# EAGLE board BeagleBone_Blue (EAGLE 7.3.0), part 1 of 4
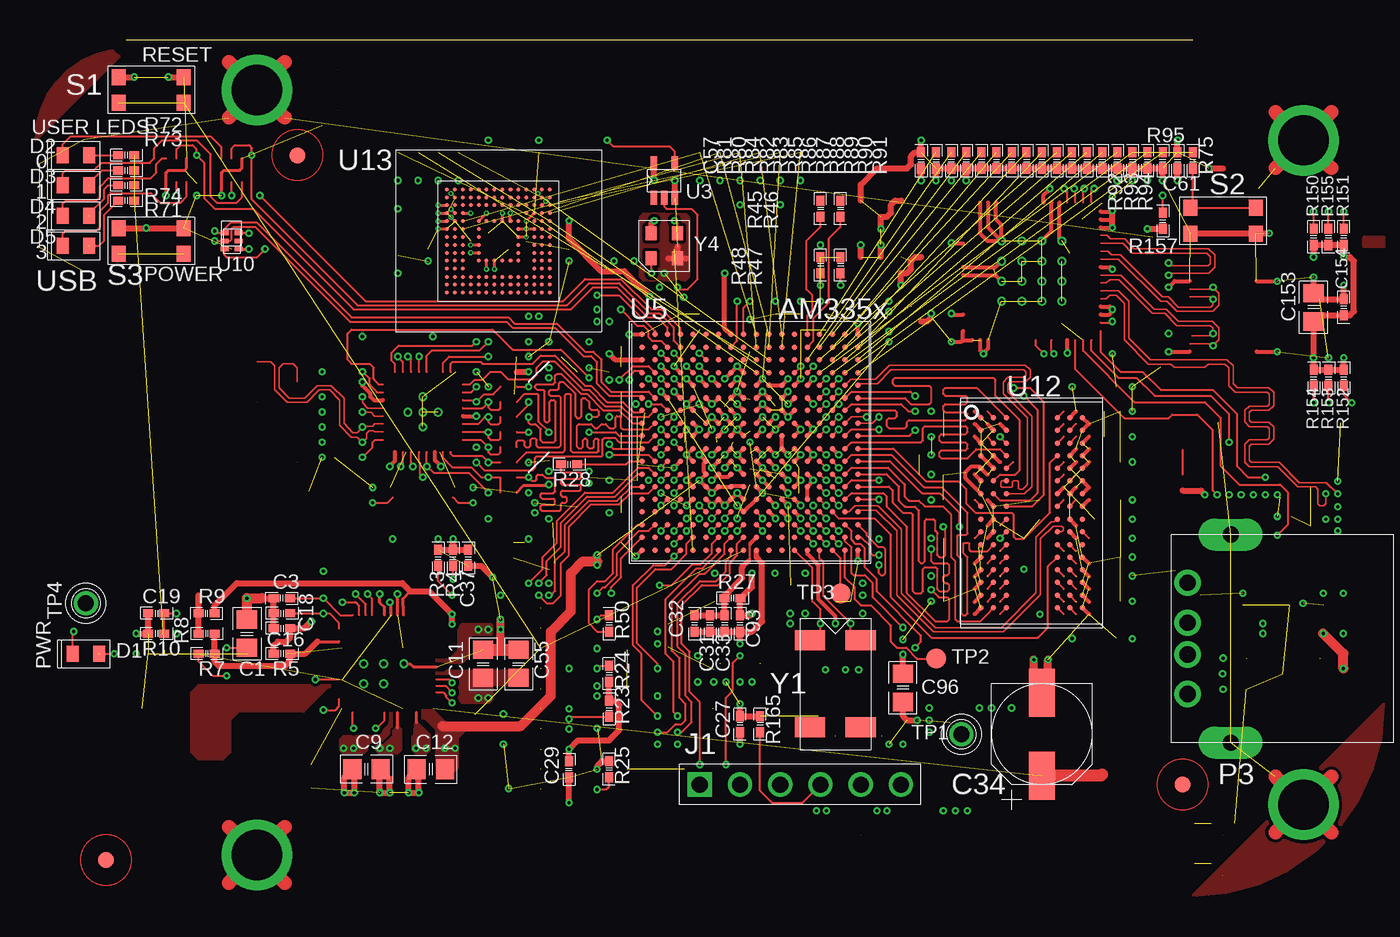
[diagram p0: board, top side]
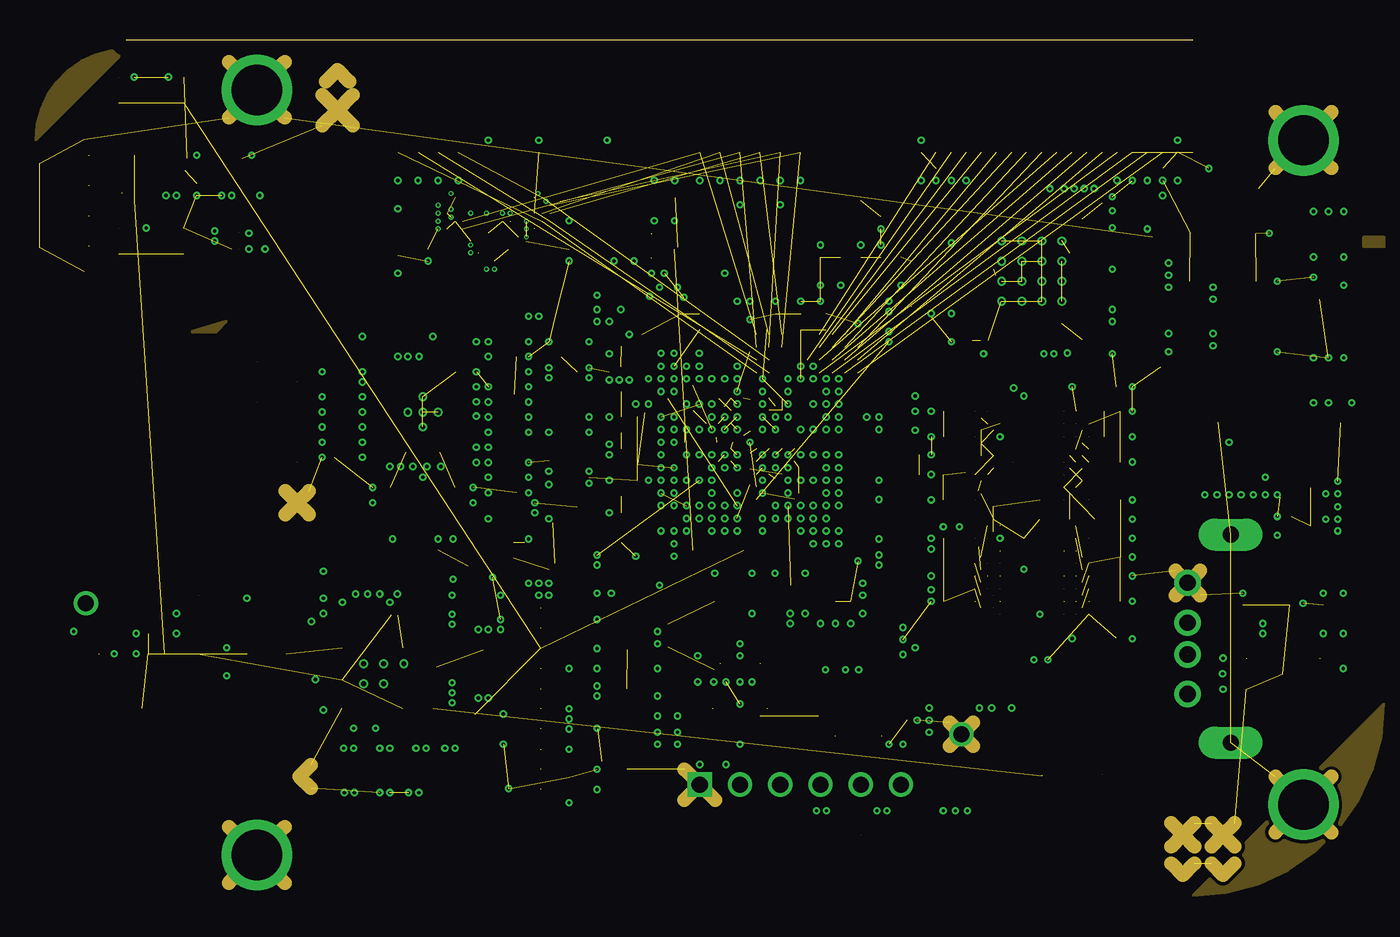
[diagram p1: board, inner layer Route2]
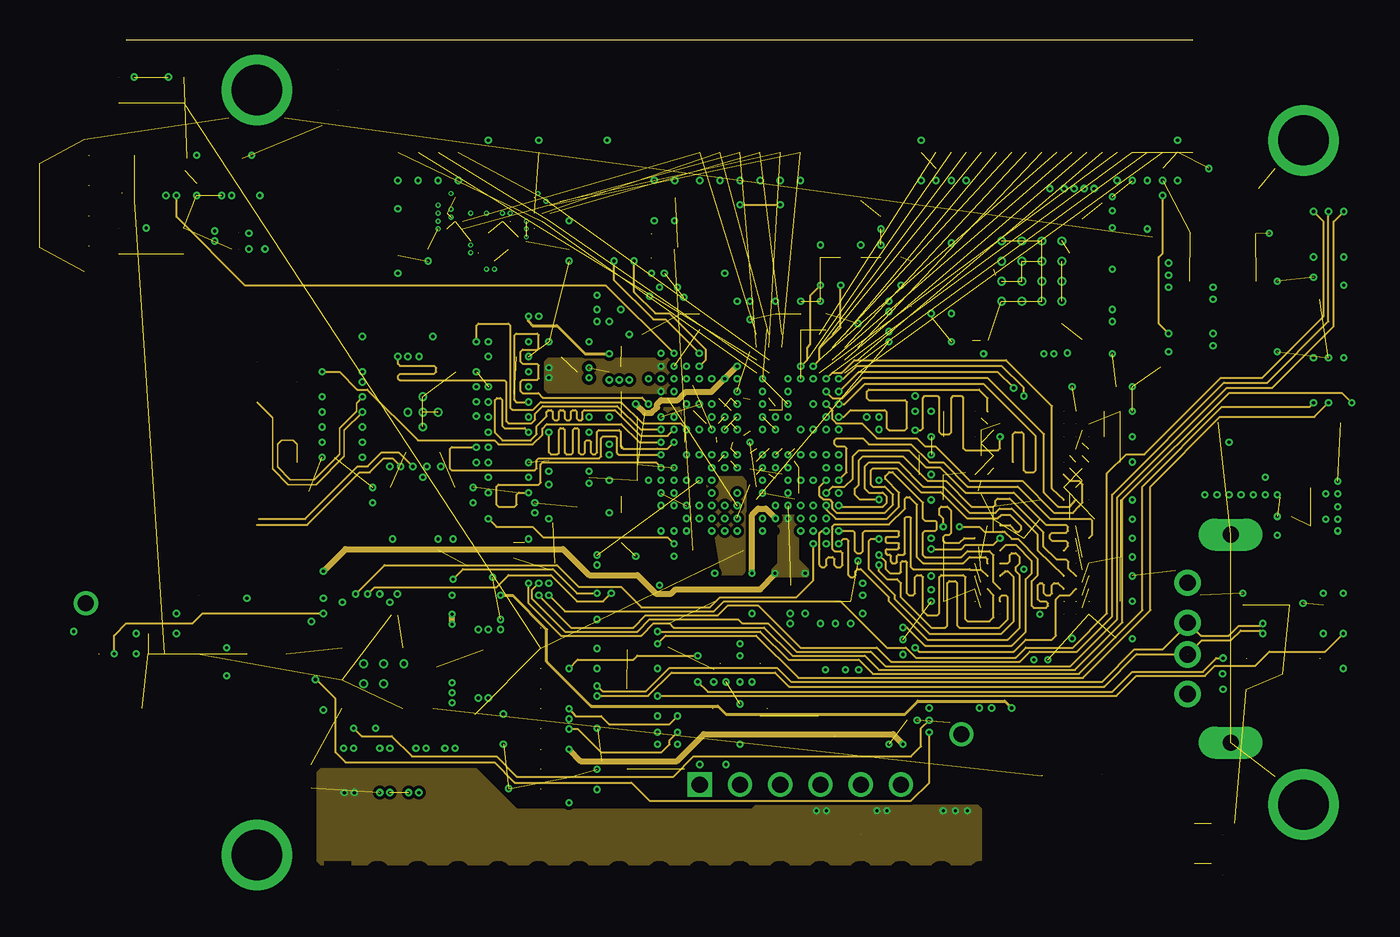
[diagram p2: board, inner layer Route3]
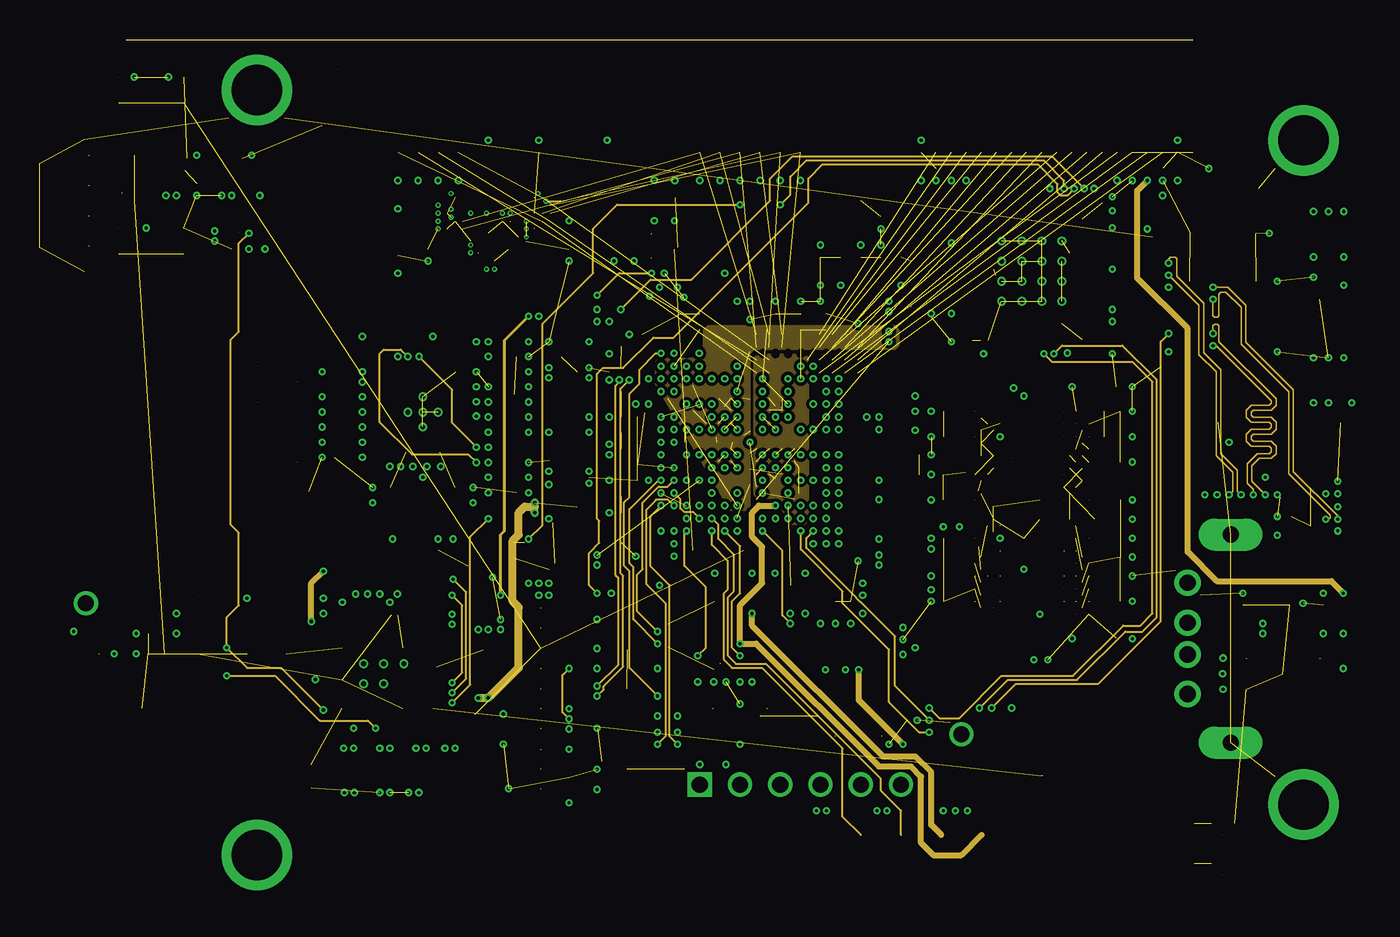
[diagram p3: board, inner layer Route4]
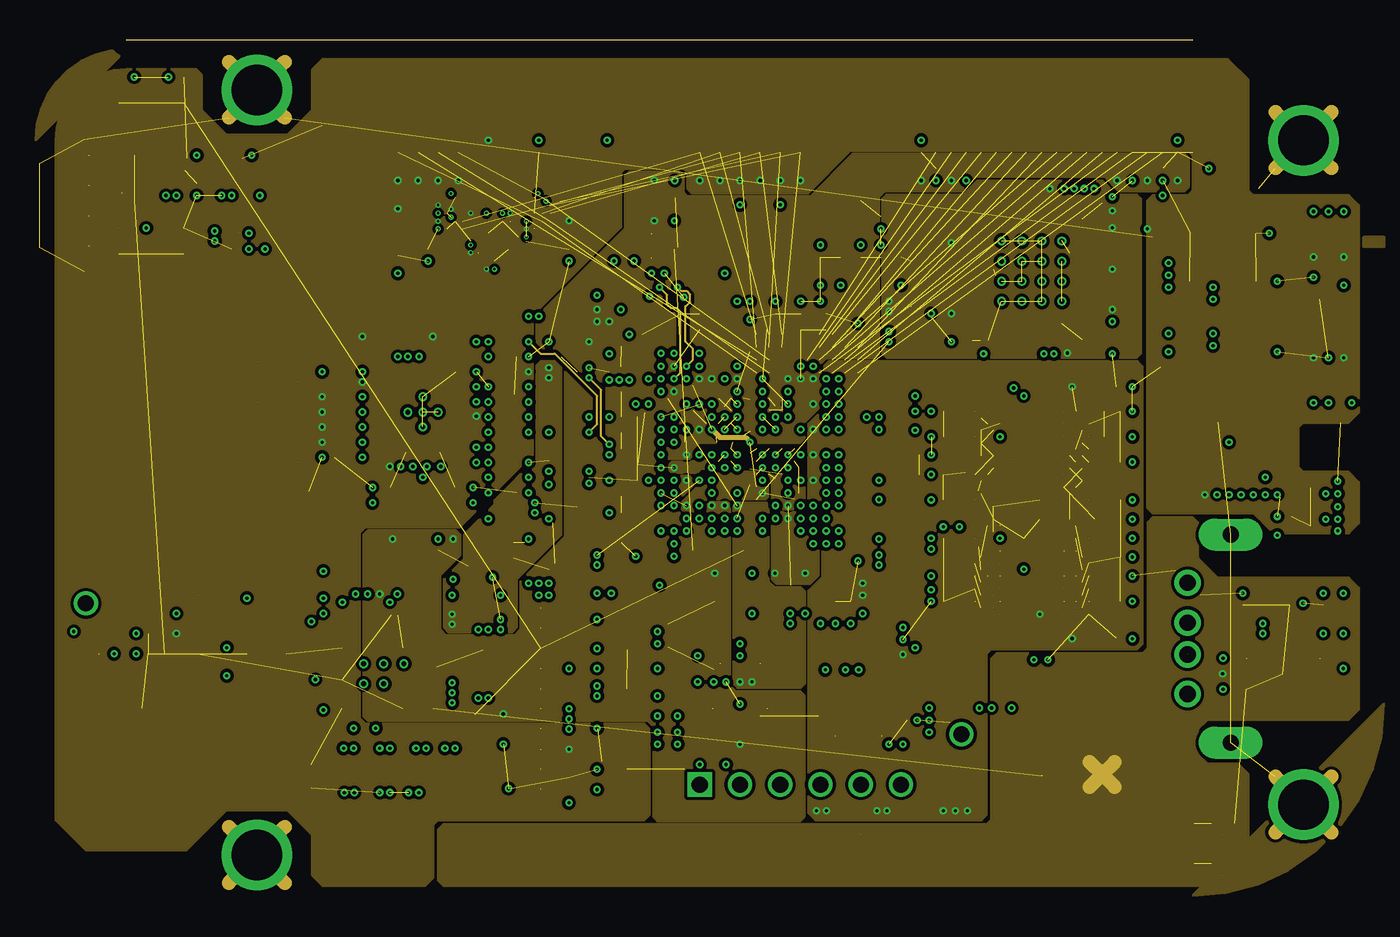
[diagram p4: board, inner layer Route5]
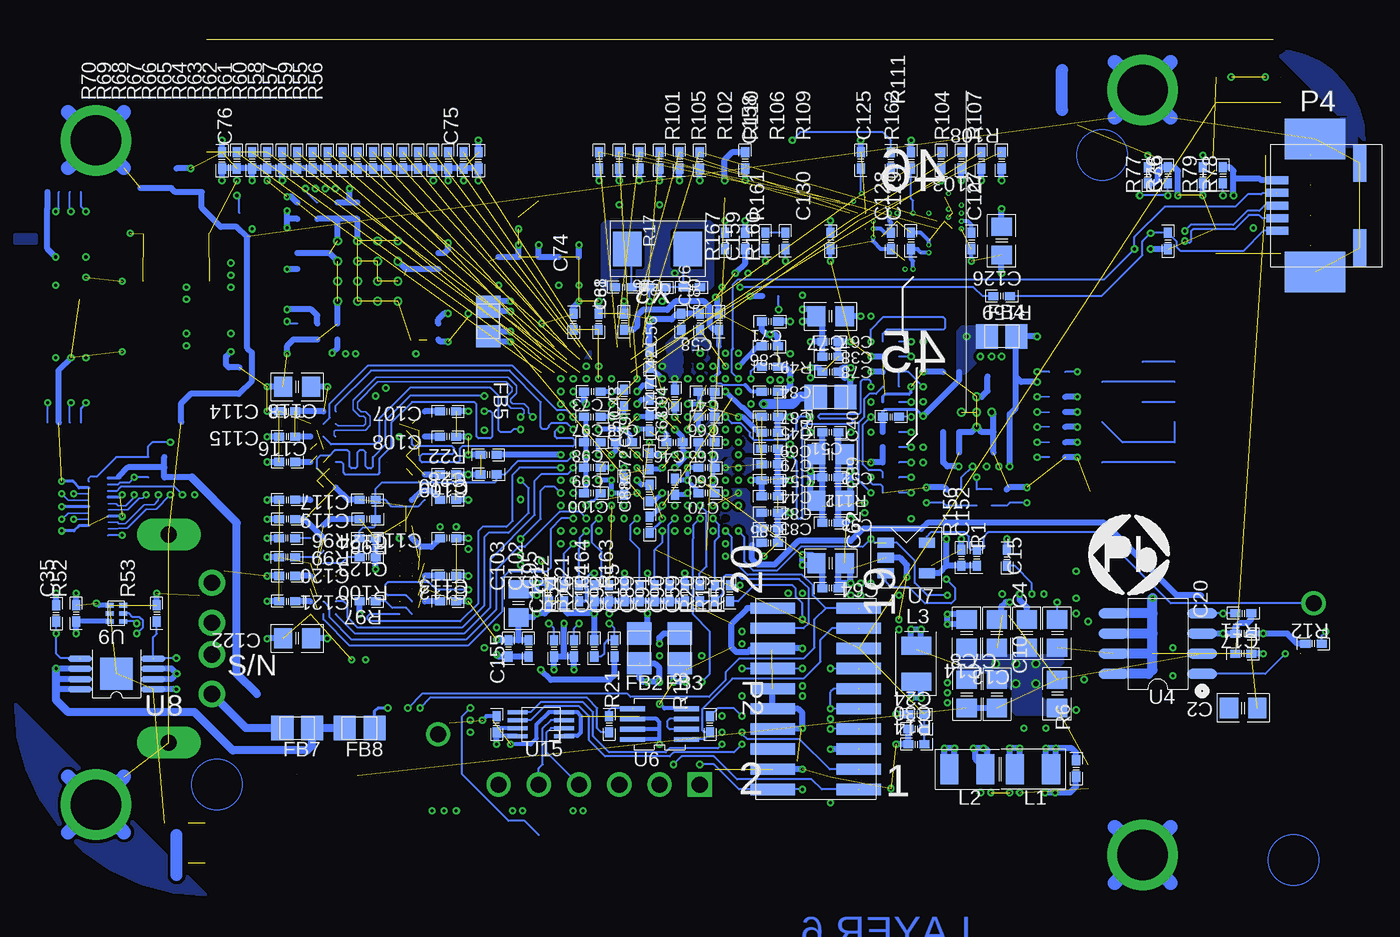
[diagram p5: board, bottom side, seen from below]

Size 67.31 x 0 mm. Coordinates in mm from the lower left corner, seen from the top.
Outline: 0,0 67.31,0
Copper layers (1*16): Top 0.035mm / dielectric 1.5mm / Bottom 0.035mm
Design rules "BeagleBone_Black_RevB4": minimum track width 10mil, minimum drill 24mil, track to track 8mil, track to pad 8mil, pad to pad 8mil, via to via 8mil, smd to smd 8mil, copper to edge 40mil, drill to drill 8mil, minimum pad ring 0mil, minimum via ring 0mil, stop-mask expansion 4mil, vias tented up to drill 0mil, thermal gap 10mil

## Footprints (pad centres in the part's own frame; a part is rotated, then mirrored left to right if it is on the bottom)
805_1PRIMARY = smd 1.143 x 1.27: 1 -0.889,0; 2 0.889,0
402_2PRIMARY = smd 0.635 x 0.508: 1 -0.508,0; 2 0.508,0
805_2PRIMARY = smd 1.143 x 1.27: 1 -0.889,0; 2 0.889,0
402_1PRIMARY = smd 0.635 x 0.508: 1 -0.508,0; 2 0.508,0
RD205SMD_250D_1PRIMARY = smd 3.048 x 1.651: 1 -2.616,0; 2 2.616,0
LED_0603_1PRIMARY = smd 0.762 x 1.016: 1 -0.838,0; 2 0.838,0
P:EX40Y40D01 = smd 1.016 x 1.016: 0 0,0
SM-7351-IND-0805_1PRIMARY = smd 1.397 x 1.549: 1 0.94,0; 2 -0.94,0
SIP6_1PRIMARY = drill 1.016 pad 1.524 square: 1 0,6.35 | drill 1.016 pad 1.524: 2 0,3.81; 3 0,1.27; 4 0,-1.27; 5 0,-3.81; 6 0,-6.35
2520_1PRIMARY = smd 1.143 x 1.905: 1 1.143,0; 2 -1.143,0
MTGH200C125D_PL_1PRIMARY = drill 3.175 pad 4.445: 1 -0.406,0
HEADER10X2_SMD_1PRIMARY = smd 0.711 x 2.794: 1 5.715,2.718; 2 5.715,-2.718; 3 4.445,2.718; 4 4.445,-2.718; 5 3.175,2.718; 6 3.175,-2.718; 7 1.905,2.718; 8 1.905,-2.718; 9 0.635,2.718; 10 0.635,-2.718; 11 -0.635,2.718; 12 -0.635,-2.718; 13 -1.905,2.718; 14 -1.905,-2.718; 15 -3.175,2.718; 16 -3.175,-2.718; 17 -4.445,2.718; 18 -4.445,-2.718; 19 -5.715,2.718; 20 -5.715,-2.718
USB_A_SH_1PRIMARY = drill 1.016 pad 1.651: 1 -3.48,5.994; 2 -0.991,5.994; 3 1.016,5.994; 4 3.531,5.994 | drill 1.016 pad 2.032 long: 5 -6.553,3.277; 6 6.579,3.277
USB5MINI_4SHIELDED_SMD-5_1PRIMARY = smd 1.397 x 0.508: 1 -2.997,-1.6; 2 -2.997,-0.813; 3 -2.997,0; 4 -2.997,0.813; 5 -2.997,1.6 | smd 3.81 x 2.54: 6 -0.61,-4.191; 7 -0.61,4.191 | smd 0.813 x 2.362: 8 2.21,-2.667; 9 2.21,2.667
SW4SMD_63X161LS_1PRIMARY = smd 0.889 x 1.016: 1 -2.057,-0.813; 2 -2.057,0.813; 3 2.057,-0.813; 4 2.057,0.813
TP1-8040_1PRIMARY = drill 1.016 pad 1.524: 1 0,0
TP60C_SMD_1PRIMARY = smd 1.27 x 1.27: 1 0,0
DCK5_2P15X1P4_1PRIMARY = smd 0.406 x 0.889: 1 -0.66,-1.092; 2 0,-1.092; 3 0.66,-1.092; 4 0.66,1.092; 5 -0.66,1.092
SO8-25X75_1PRIMARY = smd 0.635 x 1.905: 1 1.905,2.794; 2 0.635,2.794; 3 -0.635,2.794; 4 -1.905,2.794; 5 -1.905,-2.794; 6 -0.635,-2.794; 7 0.635,-2.794; 8 1.905,-2.794
AM33XX_15X15_1PRIMARY = smd 0.356 x 0.356: 1 -6.807,6.807; 2 -5.994,6.807; 3 -5.207,6.807; 4 -4.394,6.807; 5 -3.607,6.807; 6 -2.794,6.807; 7 -2.007,6.807; 8 -1.194,6.807; 9 -0.406,6.807; 10 0.406,6.807; 11 1.194,6.807; 12 2.007,6.807; 13 2.794,6.807; 14 3.607,6.807; 15 4.394,6.807; 16 5.207,6.807; 17 5.994,6.807; 18 6.807,6.807; 19 -6.807,5.994; 20 -5.994,5.994; 21 -5.207,5.994; 22 -4.394,5.994; 23 -3.607,5.994; 24 -2.794,5.994; 25 -2.007,5.994; 26 -1.194,5.994; 27 -0.406,5.994; 28 0.406,5.994; 29 1.194,5.994; 30 2.007,5.994; 31 2.794,5.994; 32 3.607,5.994; 33 4.394,5.994; 34 5.207,5.994; 35 5.994,5.994; 36 6.807,5.994; 37 -6.807,5.207; 38 -5.994,5.207; 39 -5.207,5.207; 40 -4.394,5.207; 41 -3.607,5.207; 42 -2.794,5.207; 43 -2.007,5.207; 44 -1.194,5.207; 45 -0.406,5.207; 46 0.406,5.207; 47 1.194,5.207; 48 2.007,5.207; 49 2.794,5.207; 50 3.607,5.207; 51 4.394,5.207; 52 5.207,5.207; 53 5.994,5.207; 54 6.807,5.207; 55 -6.807,4.394; 56 -5.994,4.394; 57 -5.207,4.394; 58 -4.394,4.394; 59 -3.607,4.394; 60 -2.794,4.394; 61 -2.007,4.394; 62 -1.194,4.394; 63 -0.406,4.394; 64 0.406,4.394; 65 1.194,4.394; 66 2.007,4.394; 67 2.794,4.394; 68 3.607,4.394; 69 4.394,4.394; 70 5.207,4.394; 71 5.994,4.394; 72 6.807,4.394; 73 -6.807,3.607; 74 -5.994,3.607; 75 -5.207,3.607; 76 -4.394,3.607; 77 -3.607,3.607; 78 -2.794,3.607; 79 -2.007,3.607; 80 -1.194,3.607; 81 -0.406,3.607; 82 0.406,3.607; 83 1.194,3.607; 84 2.007,3.607; 85 2.794,3.607; 86 3.607,3.607; 87 4.394,3.607; 88 5.207,3.607; 89 5.994,3.607; 90 6.807,3.607; 91 -6.807,2.794; 92 -5.994,2.794; 93 -5.207,2.794; 94 -4.394,2.794; 95 -3.607,2.794; 96 -2.794,2.794; 97 -2.007,2.794; 98 -1.194,2.794; 99 -0.406,2.794; 100 0.406,2.794; 101 1.194,2.794; 102 2.007,2.794; 103 2.794,2.794; 104 3.607,2.794; 105 4.394,2.794; 106 5.207,2.794; 107 5.994,2.794; 108 6.807,2.794; 109 -6.807,2.007; 110 -5.994,2.007; 111 -5.207,2.007; 112 -4.394,2.007; 113 -3.607,2.007; 114 -2.794,2.007; 115 -2.007,2.007; 116 -1.194,2.007; 117 -0.406,2.007; 118 0.406,2.007; 119 1.194,2.007; 120 2.007,2.007; 121 2.794,2.007; 122 3.607,2.007; 123 4.394,2.007; 124 5.207,2.007; 125 5.994,2.007; 126 6.807,2.007; 127 -6.807,1.194; 128 -5.994,1.194; 129 -5.207,1.194; 130 -4.394,1.194; 131 -3.607,1.194; 132 -2.794,1.194; 133 -2.007,1.194; 134 -1.194,1.194; 135 -0.406,1.194; 136 0.406,1.194; 137 1.194,1.194; 138 2.007,1.194; 139 2.794,1.194; 140 3.607,1.194; 141 4.394,1.194; 142 5.207,1.194; 143 5.994,1.194; 144 6.807,1.194; 145 -6.807,0.406; 146 -5.994,0.406; 147 -5.207,0.406; 148 -4.394,0.406; 149 -3.607,0.406; 150 -2.794,0.406; 151 -2.007,0.406; 152 -1.194,0.406; 153 -0.406,0.406; 154 0.406,0.406; 155 1.194,0.406; 156 2.007,0.406; 157 2.794,0.406; 158 3.607,0.406; 159 4.394,0.406; 160 5.207,0.406; 161 5.994,0.406; 162 6.807,0.406; 163 -6.807,-0.406; 164 -5.994,-0.406; 165 -5.207,-0.406; 166 -4.394,-0.406; 167 -3.607,-0.406; 168 -2.794,-0.406; 169 -2.007,-0.406; 170 -1.194,-0.406; 171 -0.406,-0.406; 172 0.406,-0.406; 173 1.194,-0.406; 174 2.007,-0.406; 175 2.794,-0.406; 176 3.607,-0.406; 177 4.394,-0.406; 178 5.207,-0.406; 179 5.994,-0.406; 180 6.807,-0.406; 181 -6.807,-1.194; 182 -5.994,-1.194; 183 -5.207,-1.194; 184 -4.394,-1.194; 185 -3.607,-1.194; 186 -2.794,-1.194; 187 -2.007,-1.194; 188 -1.194,-1.194; 189 -0.406,-1.194; 190 0.406,-1.194; 191 1.194,-1.194; 192 2.007,-1.194; 193 2.794,-1.194; 194 3.607,-1.194; 195 4.394,-1.194; 196 5.207,-1.194; 197 5.994,-1.194; 198 6.807,-1.194; 199 -6.807,-2.007; 200 -5.994,-2.007; 201 -5.207,-2.007; 202 -4.394,-2.007; 203 -3.607,-2.007; 204 -2.794,-2.007; 205 -2.007,-2.007; 206 -1.194,-2.007; 207 -0.406,-2.007; 208 0.406,-2.007; 209 1.194,-2.007; 210 2.007,-2.007; 211 2.794,-2.007; 212 3.607,-2.007; 213 4.394,-2.007; 214 5.207,-2.007; 215 5.994,-2.007; 216 6.807,-2.007; 217 -6.807,-2.794; 218 -5.994,-2.794; 219 -5.207,-2.794; 220 -4.394,-2.794; 221 -3.607,-2.794; 222 -2.794,-2.794; 223 -2.007,-2.794; 224 -1.194,-2.794; 225 -0.406,-2.794; 226 0.406,-2.794; 227 1.194,-2.794; 228 2.007,-2.794; 229 2.794,-2.794; 230 3.607,-2.794; 231 4.394,-2.794; 232 5.207,-2.794; 233 5.994,-2.794; 234 6.807,-2.794; 235 -6.807,-3.607; 236 -5.994,-3.607; 237 -5.207,-3.607; 238 -4.394,-3.607; 239 -3.607,-3.607; 240 -2.794,-3.607; 241 -2.007,-3.607; 242 -1.194,-3.607; 243 -0.406,-3.607; 244 0.406,-3.607; 245 1.194,-3.607; 246 2.007,-3.607; 247 2.794,-3.607; 248 3.607,-3.607; 249 4.394,-3.607; 250 5.207,-3.607; 251 5.994,-3.607; 252 6.807,-3.607; 253 -6.807,-4.394; 254 -5.994,-4.394; 255 -5.207,-4.394; 256 -4.394,-4.394; 257 -3.607,-4.394; 258 -2.794,-4.394; 259 -2.007,-4.394; 260 -1.194,-4.394; 261 -0.406,-4.394; 262 0.406,-4.394; 263 1.194,-4.394; 264 2.007,-4.394; 265 2.794,-4.394; 266 3.607,-4.394; 267 4.394,-4.394; 268 5.207,-4.394; 269 5.994,-4.394; 270 6.807,-4.394; 271 -6.807,-5.207; 272 -5.994,-5.207; 273 -5.207,-5.207; 274 -4.394,-5.207; 275 -3.607,-5.207; 276 -2.794,-5.207; 277 -2.007,-5.207; 278 -1.194,-5.207; 279 -0.406,-5.207; 280 0.406,-5.207; 281 1.194,-5.207; 282 2.007,-5.207; 283 2.794,-5.207; 284 3.607,-5.207; 285 4.394,-5.207; 286 5.207,-5.207; 287 5.994,-5.207; 288 6.807,-5.207; 289 -6.807,-5.994; 290 -5.994,-5.994; 291 -5.207,-5.994; 292 -4.394,-5.994; 293 -3.607,-5.994; 294 -2.794,-5.994; 295 -2.007,-5.994; 296 -1.194,-5.994; 297 -0.406,-5.994; 298 0.406,-5.994; 299 1.194,-5.994; 300 2.007,-5.994; 301 2.794,-5.994; 302 3.607,-5.994; 303 4.394,-5.994; 304 5.207,-5.994; 305 5.994,-5.994; 306 6.807,-5.994; 307 -6.807,-6.807; 308 -5.994,-6.807; 309 -5.207,-6.807; 310 -4.394,-6.807; 311 -3.607,-6.807; 312 -2.794,-6.807; 313 -2.007,-6.807; 314 -1.194,-6.807; 315 -0.406,-6.807; 316 0.406,-6.807; 317 1.194,-6.807; 318 2.007,-6.807; 319 2.794,-6.807; 320 3.607,-6.807; 321 4.394,-6.807; 322 5.207,-6.807; 323 5.994,-6.807; 324 6.807,-6.807
SOP8_DCT_1PRIMARY = smd 0.305 x 1.6: 1 0.965,1.702; 2 0.33,1.702; 3 -0.33,1.702; 4 -0.965,1.702; 5 -0.965,-1.702; 6 -0.33,-1.702; 7 0.33,-1.702; 8 0.965,-1.702
SOT23-5_1PRIMARY = smd 0.635 x 1.016: 1 0.965,1.295; 2 0,1.295; 3 -0.965,1.295; 4 -0.965,-1.295; 5 0.965,-1.295
DGN-16X60_1PRIMARY = smd 0.406 x 1.524: 1 0.965,2.311; 2 0.33,2.311; 3 -0.33,2.311; 4 -0.965,2.311; 5 -0.965,-2.311; 6 -0.33,-2.311; 7 0.33,-2.311; 8 0.965,-2.311 | smd 2.032 x 2.032: 9 0,0
U_6_DRY_1PRIMARY = smd 0.305 x 0.508: 1 -0.508,-0.432; 2 0,-0.432; 3 0.508,-0.432; 4 0.508,0.432; 5 0,0.432; 6 -0.508,0.432
BGA96_T9_P8_9X14_1PRIMARY = smd 0.356 x 0.356: 1 -3.2,5.994; 2 -2.413,5.994; 3 -1.6,5.994; 4 1.6,5.994; 5 2.413,5.994; 6 3.2,5.994; 7 -3.2,5.207; 8 -2.413,5.207; 9 -1.6,5.207; 10 1.6,5.207; 11 2.413,5.207; 12 3.2,5.207; 13 -3.2,4.394; 14 -2.413,4.394; 15 -1.6,4.394; 16 1.6,4.394; 17 2.413,4.394; 18 3.2,4.394; 19 -3.2,3.607; 20 -2.413,3.607; 21 -1.6,3.607; 22 1.6,3.607; 23 2.413,3.607; 24 3.2,3.607; 25 -3.2,2.794; 26 -2.413,2.794; 27 -1.6,2.794; 28 1.6,2.794; 29 2.413,2.794; 30 3.2,2.794; 31 -3.2,2.007; 32 -2.413,2.007; 33 -1.6,2.007; 34 1.6,2.007; 35 2.413,2.007; 36 3.2,2.007; 37 -3.2,1.194; 38 -2.413,1.194; 39 -1.6,1.194; 40 1.6,1.194; 41 2.413,1.194; 42 3.2,1.194; 43 -3.2,0.406; 44 -2.413,0.406; 45 -1.6,0.406; 46 1.6,0.406; 47 2.413,0.406; 48 3.2,0.406; 49 -3.2,-0.406; 50 -2.413,-0.406; 51 -1.6,-0.406; 52 1.6,-0.406; 53 2.413,-0.406; 54 3.2,-0.406; 55 -3.2,-1.194; 56 -2.413,-1.194; 57 -1.6,-1.194; 58 1.6,-1.194; 59 2.413,-1.194; 60 3.2,-1.194; 61 -3.2,-2.007; 62 -2.413,-2.007; 63 -1.6,-2.007; 64 1.6,-2.007; 65 2.413,-2.007; 66 3.2,-2.007; 67 -3.2,-2.794; 68 -2.413,-2.794; 69 -1.6,-2.794; 70 1.6,-2.794; 71 2.413,-2.794; 72 3.2,-2.794; 73 -3.2,-3.607; 74 -2.413,-3.607; 75 -1.6,-3.607; 76 1.6,-3.607; 77 2.413,-3.607; 78 3.2,-3.607; 79 -3.2,-4.394; 80 -2.413,-4.394; 81 -1.6,-4.394; 82 1.6,-4.394; 83 2.413,-4.394; 84 3.2,-4.394; 85 -3.2,-5.207; 86 -2.413,-5.207; 87 -1.6,-5.207; 88 1.6,-5.207; 89 2.413,-5.207; 90 3.2,-5.207; 91 -3.2,-5.994; 92 -2.413,-5.994; 93 -1.6,-5.994; 94 1.6,-5.994; 95 2.413,-5.994; 96 3.2,-5.994
BGA153_P14_P5_11P5X13_1PRIMARY = smd 0.254 x 0.254: 1 -3.251,3.251; 2 -2.743,3.251; 3 -2.261,3.251; 4 -1.753,3.251; 5 -1.245,3.251; 6 -0.762,3.251; 7 -0.254,3.251; 8 0.254,3.251; 9 0.762,3.251; 10 1.245,3.251; 11 1.753,3.251; 12 2.261,3.251; 13 2.743,3.251; 14 3.251,3.251; 15 -3.251,2.743; 16 -2.743,2.743; 17 -2.261,2.743; 18 -1.753,2.743; 19 -1.245,2.743; 20 -0.762,2.743; 21 -0.254,2.743; 22 0.254,2.743; 23 0.762,2.743; 24 1.245,2.743; 25 1.753,2.743; 26 2.261,2.743; 27 2.743,2.743; 28 3.251,2.743; 29 -3.251,2.261; 30 -2.743,2.261; 31 -2.261,2.261; 32 -1.753,2.261; 33 -1.245,2.261; 34 -0.762,2.261; 35 -0.254,2.261; 36 0.254,2.261; 37 0.762,2.261; 38 1.245,2.261; 39 1.753,2.261; 40 2.261,2.261; 41 2.743,2.261; 42 3.251,2.261; 43 -3.251,1.753; 44 -2.743,1.753; 45 -2.261,1.753; 46 -1.753,1.753; 47 2.261,1.753; 48 2.743,1.753; 49 3.251,1.753; 50 -3.251,1.245; 51 -2.743,1.245; 52 -2.261,1.245; 53 -1.245,1.245; 54 -0.762,1.245; 55 -0.254,1.245; 56 0.254,1.245; 57 0.762,1.245; 58 1.245,1.245; 59 2.261,1.245; 60 2.743,1.245; 61 3.251,1.245; 62 -3.251,0.762; 63 -2.743,0.762; 64 -2.261,0.762; 65 -1.245,0.762; 66 1.245,0.762; 67 2.261,0.762; 68 2.743,0.762; 69 3.251,0.762; 70 -3.251,0.254; 71 -2.743,0.254; 72 -2.261,0.254; 73 -1.245,0.254; 74 1.245,0.254; 75 2.261,0.254; 76 2.743,0.254; 77 3.251,0.254; 78 -3.251,-0.254; 79 -2.743,-0.254; 80 -2.261,-0.254; 81 -1.245,-0.254; 82 1.245,-0.254; 83 2.261,-0.254; 84 2.743,-0.254; 85 3.251,-0.254; 86 -3.251,-0.762; 87 -2.743,-0.762; 88 -2.261,-0.762; 89 -1.245,-0.762; 90 1.245,-0.762; 91 2.261,-0.762; 92 2.743,-0.762; 93 3.251,-0.762; 94 -3.251,-1.245; 95 -2.743,-1.245; 96 -2.261,-1.245; 97 -1.245,-1.245; 98 -0.762,-1.245; 99 -0.254,-1.245; 100 0.254,-1.245; 101 0.762,-1.245; 102 1.245,-1.245; 103 2.261,-1.245; 104 2.743,-1.245; 105 3.251,-1.245; 106 -3.251,-1.753; 107 -2.743,-1.753; 108 -2.261,-1.753; 109 2.261,-1.753; 110 2.743,-1.753; 111 3.251,-1.753; 112 -3.251,-2.261; 113 -2.743,-2.261; 114 -2.261,-2.261; 115 -1.753,-2.261; 116 -1.245,-2.261; 117 -0.762,-2.261; 118 -0.254,-2.261; 119 0.254,-2.261; 120 0.762,-2.261; 121 1.245,-2.261; 122 1.753,-2.261; 123 2.261,-2.261; 124 2.743,-2.261; 125 3.251,-2.261; 126 -3.251,-2.743; 127 -2.743,-2.743; 128 -2.261,-2.743; 129 -1.753,-2.743; 130 -1.245,-2.743; 131 -0.762,-2.743; 132 -0.254,-2.743; 133 0.254,-2.743; 134 0.762,-2.743; 135 1.245,-2.743; 136 1.753,-2.743; 137 2.261,-2.743; 138 2.743,-2.743; 139 3.251,-2.743; 140 -3.251,-3.251; 141 -2.743,-3.251; 142 -2.261,-3.251; 143 -1.753,-3.251; 144 -1.245,-3.251; 145 -0.762,-3.251; 146 -0.254,-3.251; 147 0.254,-3.251; 148 0.762,-3.251; 149 1.245,-3.251; 150 1.753,-3.251; 151 2.261,-3.251; 152 2.743,-3.251; 153 3.251,-3.251
U_8_DCU_1PRIMARY = smd 0.254 x 1.27: 1 0.762,1.473; 2 0.254,1.473; 3 -0.254,1.473; 4 -0.762,1.473; 5 -0.762,-1.473; 6 -0.254,-1.473; 7 0.254,-1.473; 8 0.762,-1.473
XTAL4_126-216SMD_1PRIMARY = smd 1.27 x 1.905: 1 -2.743,-1.6; 2 2.743,-1.6; 3 2.743,1.6; 4 -2.743,1.6
XTAL150SMD_125X196_1PRIMARY = smd 1.778 x 2.159: 1 -1.905,0; 2 1.905,0
OSC4_61X65LS_79X98SMD_1PRIMARY = smd 0.711 x 0.889: 1 -0.838,-0.787; 2 0.838,-0.787; 3 0.838,0.787; 4 -0.838,0.787

## Placement (x,y rotation side)
C1  10uF,_10V  [805_1PRIMARY]  7.62,-37.47 270 top  (outside the outline)
C2  10uF,_10V  [805_1PRIMARY]  1.9,-42.16 180 bottom  (outside the outline)
C3  0.1uf,_6V3  [402_2PRIMARY]  9.83,-35.23 0 top  (outside the outline)
C4  10uF,_10V  [805_2PRIMARY]  13.64,-37.47 90 bottom  (outside the outline)
C7  10uF,_10V  [805_1PRIMARY]  17.45,-41.28 270 bottom  (outside the outline)
C8  10uF,_10V  [805_1PRIMARY]  19.35,-41.28 270 bottom  (outside the outline)
C9  10uF,_10V  [805_1PRIMARY]  15.16,-46.02 180 top  (outside the outline)
C10  10uF,_10V  [805_2PRIMARY]  13.64,-41.28 90 bottom  (outside the outline)
C11  10uF,_10V  [805_1PRIMARY]  22.53,-39.37 270 top  (outside the outline)
C12  10uF,_10V  [805_1PRIMARY]  19.23,-46.02 0 top  (outside the outline)
C13  10uF,_10V  [805_2PRIMARY]  17.45,-37.47 90 bottom  (outside the outline)
C14  10uF,_10V  [805_2PRIMARY]  19.35,-37.47 90 bottom  (outside the outline)
C15  10uF,_10V  [805_2PRIMARY]  15.54,-37.47 90 bottom  (outside the outline)
C16  2.2uF,_6V3  [402_2PRIMARY]  9.83,-37.13 180 top  (outside the outline)
C17  2.2uF,_6V3  [402_1PRIMARY]  1.9,-38.73 0 bottom  (outside the outline)
C18  2.2uF,_6V3  [402_2PRIMARY]  9.83,-36.2 180 top  (outside the outline)
C19  470pF,_50V  [402_2PRIMARY]  1.9,-36.2 180 top  (outside the outline)
C20  0.1uf,_6V3  [402_1PRIMARY]  1.9,-37.47 0 bottom  (outside the outline)
C21  18pF,_50V  [402_1PRIMARY]  44.12,-38.4 90 bottom  (outside the outline)
C22  18pF,_50V  [402_1PRIMARY]  45.39,-38.4 90 bottom  (outside the outline)
C24  1uF,_10V  [402_1PRIMARY]  22.53,-43.48 180 bottom  (outside the outline)
C25  18pF,_50V  [402_1PRIMARY]  41.02,-15.62 180 bottom  (outside the outline)
C26  18pF,_50V  [402_1PRIMARY]  36.7,-15.62 0 bottom  (outside the outline)
C27  0.1uf,_6V3  [402_2PRIMARY]  38.73,-43.18 90 top  (outside the outline)
C28  0.1uf,_6V3  [402_1PRIMARY]  49.53,-27.43 180 bottom  (outside the outline)
C29  0.1uf,_6V3  [402_2PRIMARY]  27.94,-46.02 270 top  (outside the outline)
C30  0.1uf,_6V3  [402_1PRIMARY]  22.53,-44.45 180 bottom  (outside the outline)
C31  0.1uf,_6V3  [402_2PRIMARY]  36.83,-36.83 270 top  (outside the outline)
C32  1nF,_50V  [402_2PRIMARY]  35.86,-36.83 270 top  (outside the outline)
C33  0.1uf,_6V3  [402_2PRIMARY]  37.77,-36.83 270 top  (outside the outline)
C34  100uF,_6V3  [RD205SMD_250D_1PRIMARY]  57.79,-43.81 90 top  (outside the outline)
C35  0.1uf,_6V3  [402_1PRIMARY]  75.54,-36.2 90 bottom  (outside the outline)
C36  0.1uf,_6V3  [402_2PRIMARY]  6.65,-12.7 270 bottom  (outside the outline)
C37  0.1uf,_6V3  [402_2PRIMARY]  21.59,-32.69 270 top  (outside the outline)
C38  0.1uf,_6V3  [402_1PRIMARY]  27.94,-19.99 0 bottom  (outside the outline)
C39  10uF,_10V  [805_1PRIMARY]  27.94,-29.08 180 bottom  (outside the outline)
C40  10uF,_10V  [805_1PRIMARY]  27.94,-26.16 180 bottom  (outside the outline)
C41  0.1uf,_6V3  [402_1PRIMARY]  35.76,-22.2 0 bottom  (outside the outline)
C42  0.1uf,_6V3  [402_2PRIMARY]  39.37,-22.2 270 bottom  (outside the outline)
C43  0.1uf,_6V3  [402_1PRIMARY]  40.97,-22.61 90 bottom  (outside the outline)
C44  0.1uf,_6V3  [402_1PRIMARY]  31.78,-28.8 0 bottom  (outside the outline)
C45  0.1uf,_6V3  [402_1PRIMARY]  31.78,-24.79 0 bottom  (outside the outline)
C46  0.1uf,_6V3  [402_1PRIMARY]  37.8,-25.4 180 bottom  (outside the outline)
C47  0.1uf,_6V3  [402_2PRIMARY]  39.37,-24.21 270 bottom  (outside the outline)
C48  0.1uf,_6V3  [402_1PRIMARY]  40.97,-25.4 180 bottom  (outside the outline)
C49  0.1uf,_6V3  [402_1PRIMARY]  39.37,-26.59 90 bottom  (outside the outline)
C50  0.1uf,_6V3  [402_1PRIMARY]  40.97,-28.19 90 bottom  (outside the outline)
C51  0.1uf,_6V3  [402_1PRIMARY]  27.94,-24.77 0 bottom  (outside the outline)
C52  0.1uf,_6V3  [402_1PRIMARY]  27.94,-27.61 0 bottom  (outside the outline)
C53  0.1uf,_6V3  [402_1PRIMARY]  27.94,-30.48 0 bottom  (outside the outline)
C54  0.1uf,_6V3  [402_1PRIMARY]  31.78,-27.79 0 bottom  (outside the outline)
C55  10uF,_10V  [805_1PRIMARY]  24.77,-39.37 270 top  (outside the outline)
C56  0.1uf,_6V3  [402_2PRIMARY]  39.37,-20.19 270 bottom  (outside the outline)
C57  0.1uf,_6V3  [402_2PRIMARY]  50.16,-7.62 270 top  (outside the outline)
C58  0.1uf,_6V3  [402_1PRIMARY]  36.17,-17.81 90 bottom  (outside the outline)
C59  0.1uf,_6V3  [402_2PRIMARY]  37.13,-34.92 270 bottom  (outside the outline)
C60  0.1uf,_6V3  [402_1PRIMARY]  35.76,-27 0 bottom  (outside the outline)
C61  0.1uf,_6V3  [402_2PRIMARY]  66.34,-7.62 270 top  (outside the outline)
C62  10uF,_10V  [805_1PRIMARY]  27.94,-33.02 180 bottom  (outside the outline)
C63  0.1uf,_6V3  [402_1PRIMARY]  37.77,-28.19 90 bottom  (outside the outline)
C64  0.1uf,_6V3  [402_1PRIMARY]  27.94,-34.59 0 bottom  (outside the outline)
C65  0.1uf,_6V3  [402_1PRIMARY]  35.76,-25.4 0 bottom  (outside the outline)
C66  0.1uf,_6V3  [402_1PRIMARY]  35.76,-23.8 0 bottom  (outside the outline)
C67  0.1uf,_6V3  [402_1PRIMARY]  27.94,-19.05 0 bottom  (outside the outline)
C68  0.1uf,_6V3  [402_2PRIMARY]  42.57,-17.81 270 bottom  (outside the outline)
C69  0.1uf,_6V3  [402_1PRIMARY]  31.78,-25.81 180 bottom  (outside the outline)
C70  0.1uf,_6V3  [402_1PRIMARY]  35.76,-28.6 0 bottom  (outside the outline)
C71  0.1uf,_6V3  [402_1PRIMARY]  31.75,-17.78 0 bottom  (outside the outline)
C72  0.1uf,_6V3  [402_2PRIMARY]  39.37,-28.6 270 bottom  (outside the outline)
C73  0.1uf,_6V3  [402_1PRIMARY]  42.98,-22.2 180 bottom  (outside the outline)
C74  0.1uf,_6V3  [402_2PRIMARY]  44.17,-17.81 270 bottom  (outside the outline)
C75  0.1uf,_6V3  [402_2PRIMARY]  50.16,-7.62 270 bottom  (outside the outline)
C76  0.1uf,_6V3  [402_2PRIMARY]  66.34,-7.62 270 bottom  (outside the outline)
C77  10uF,_10V  [805_2PRIMARY]  27.94,-17.45 0 bottom  (outside the outline)
C78  0.1uf,_6V3  [402_1PRIMARY]  27.94,-20.95 180 bottom  (outside the outline)
C79  0.1uf,_6V3  [402_1PRIMARY]  31.78,-26.8 0 bottom  (outside the outline)
C80  0.1uf,_6V3  [402_1PRIMARY]  34.98,-17.81 90 bottom  (outside the outline)
C81  0.1uf,_6V3  [402_1PRIMARY]  40.97,-17.81 90 bottom  (outside the outline)
C82  0.1uf,_6V3  [402_1PRIMARY]  31.78,-29.85 0 bottom  (outside the outline)
C83  0.1uf,_6V3  [402_1PRIMARY]  31.78,-30.81 0 bottom  (outside the outline)
C84  0.1uf,_6V3  [402_1PRIMARY]  31.78,-22.2 0 bottom  (outside the outline)
C85  0.1uf,_6V3  [402_1PRIMARY]  31.78,-31.75 0 bottom  (outside the outline)
C86  0.1uf,_6V3  [402_1PRIMARY]  31.78,-19.35 0 bottom  (outside the outline)
C87  0.1uf,_6V3  [402_1PRIMARY]  31.78,-23.8 0 bottom  (outside the outline)
C88  0.1uf,_6V3  [402_2PRIMARY]  39.37,-30.61 270 bottom  (outside the outline)
C89  1uF,_10V  [402_2PRIMARY]  40,-34.92 270 bottom  (outside the outline)
C90  1uF,_10V  [402_2PRIMARY]  38.1,-34.92 270 bottom  (outside the outline)
C91  1uF,_10V  [402_2PRIMARY]  39.04,-34.92 270 bottom  (outside the outline)
C92  0.1uf,_6V3  [402_2PRIMARY]  41.91,-34.92 270 bottom  (outside the outline)
C93  0.1uf,_6V3  [402_2PRIMARY]  38.73,-36.83 270 top  (outside the outline)
C94  0.1uf,_6V3  [402_2PRIMARY]  37.77,-22.61 270 bottom  (outside the outline)
C95  10uF,_10V  [805_2PRIMARY]  47.62,-35.56 90 bottom  (outside the outline)
C96  10uF,_10V  [805_1PRIMARY]  49.02,-40.89 90 top  (outside the outline)
C97  0.1uf,_6V3  [402_1PRIMARY]  42.98,-23.8 0 bottom  (outside the outline)
C98  0.1uf,_6V3  [402_1PRIMARY]  42.98,-25.4 0 bottom  (outside the outline)
C99  0.1uf,_6V3  [402_1PRIMARY]  42.98,-27 0 bottom  (outside the outline)
C100  0.1uf,_6V3  [402_1PRIMARY]  42.98,-28.6 0 bottom  (outside the outline)
C101  0.1uf,_6V3  [402_2PRIMARY]  45.72,-34.92 270 bottom  (outside the outline)
C102  0.1uf,_6V3  [402_1PRIMARY]  46.99,-38.4 90 bottom  (outside the outline)
C103  0.1uf,_6V3  [402_1PRIMARY]  48.26,-38.4 90 bottom  (outside the outline)
C104  1uF,_10V  [402_2PRIMARY]  42.85,-34.92 270 bottom  (outside the outline)
C105  0.1uf,_6V3  [402_2PRIMARY]  40.94,-34.92 270 bottom  (outside the outline)
C106  0.1uf,_6V3  [402_1PRIMARY]  37.36,-17.81 90 bottom  (outside the outline)
C107  0.1uf,_6V3  [402_1PRIMARY]  52.07,-23.44 0 bottom  (outside the outline)
C108  0.1uf,_6V3  [402_1PRIMARY]  52.07,-25.04 0 bottom  (outside the outline)
C109  0.1uf,_6V3  [402_1PRIMARY]  52.07,-27.43 0 bottom  (outside the outline)
C110  0.1uf,_6V3  [402_1PRIMARY]  52.07,-29.03 0 bottom  (outside the outline)
C111  0.1uf,_6V3  [402_1PRIMARY]  52.07,-31.45 0 bottom  (outside the outline)
C112  0.1uf,_6V3  [402_1PRIMARY]  52.07,-33.83 0 bottom  (outside the outline)
C113  0.1uf,_6V3  [402_1PRIMARY]  52.07,-35.43 0 bottom  (outside the outline)
C114  0.1uf,_6V3  [402_1PRIMARY]  62.23,-23.44 180 bottom  (outside the outline)
C115  0.1uf,_6V3  [402_1PRIMARY]  62.23,-25.04 180 bottom  (outside the outline)
C116  0.1uf,_6V3  [402_1PRIMARY]  62.23,-26.64 180 bottom  (outside the outline)
C117  0.1uf,_6V3  [402_1PRIMARY]  62.23,-29.03 180 bottom  (outside the outline)
C118  10uF,_10V  [805_2PRIMARY]  61.59,-21.89 0 bottom  (outside the outline)
C119  0.1uf,_6V3  [402_1PRIMARY]  62.23,-30.25 180 bottom  (outside the outline)
C120  0.1uf,_6V3  [402_1PRIMARY]  62.23,-33.83 180 bottom  (outside the outline)
C121  0.1uf,_6V3  [402_1PRIMARY]  62.23,-35.43 180 bottom  (outside the outline)
C122  10uF,_10V  [805_2PRIMARY]  61.59,-37.77 0 bottom  (outside the outline)
C123  1nF,_50V  [402_1PRIMARY]  57.15,-30.25 180 bottom  (outside the outline)
C124  0.1uf,_6V3  [402_1PRIMARY]  57.15,-32.64 0 bottom  (outside the outline)
C125  2.2uF,_6V3  [402_1PRIMARY]  26.03,-7.62 90 bottom  (outside the outline)
C126  10uF,_10V  [805_2PRIMARY]  17.15,-12.7 90 bottom  (outside the outline)
C127  0.1uf,_6V3  [402_2PRIMARY]  19.05,-12.7 270 bottom  (outside the outline)
C128  0.1uf,_6V3  [402_1PRIMARY]  22.86,-12.7 90 bottom  (outside the outline)
C129  0.1uf,_6V3  [402_2PRIMARY]  24.13,-12.7 270 bottom  (outside the outline)
C130  0.1uf,_6V3  [402_2PRIMARY]  27.94,-12.7 270 bottom  (outside the outline)
C152  0.1uf,_6V3  [402_1PRIMARY]  19.68,-32.69 90 bottom  (outside the outline)
C153  10uF,_10V  [805_1PRIMARY]  74.93,-16.89 90 top  (outside the outline)
C154  0.1uf,_6V3  [402_2PRIMARY]  76.84,-16.89 90 top  (outside the outline)
C155  0.1uf,_6V3  [402_2PRIMARY]  49.02,-43.18 270 bottom  (outside the outline)
C158  0.1uf,_6V3  [402_1PRIMARY]  33.32,-7.62 90 bottom  (outside the outline)
C159  0.1uf,_6V3  [402_2PRIMARY]  33.32,-12.7 270 bottom  (outside the outline)
D1  598-8170-107F  [LED_0603_1PRIMARY]  -2.54,-38.73 0 top  (outside the outline)
D2  598-8170-107F  [LED_0603_1PRIMARY]  -3.17,-7.29 0 top  (outside the outline)
D3  598-8170-107F  [LED_0603_1PRIMARY]  -3.17,-9.19 0 top  (outside the outline)
D4  598-8170-107F  [LED_0603_1PRIMARY]  -3.17,-11.1 0 top  (outside the outline)
D5  598-8170-107F  [LED_0603_1PRIMARY]  -3.17,-13 0 top  (outside the outline)
DUMMY1  [P:EX40Y40D01]  -1.27,-51.75 0 top  (outside the outline)
DUMMY2  [P:EX40Y40D01]  66.67,-46.99 0 top  (outside the outline)
DUMMY3  [P:EX40Y40D01]  10.79,-7.3 0 top  (outside the outline)
FB1  150OHM800mA  [SM-7351-IND-0805_1PRIMARY]  27.94,-22.53 0 bottom  (outside the outline)
FB2  150OHM800mA  [SM-7351-IND-0805_1PRIMARY]  40,-38.4 90 bottom  (outside the outline)
FB3  150OHM800mA  [SM-7351-IND-0805_1PRIMARY]  37.46,-38.4 90 bottom  (outside the outline)
FB4  150OHM800mA  [SM-7351-IND-0805_1PRIMARY]  17.15,-18.72 180 bottom  (outside the outline)
FB5  150OHM800mA  [SM-7351-IND-0805_1PRIMARY]  49.53,-17.78 90 bottom  (outside the outline)
FB7  150OHM800mA  [SM-7351-IND-0805_1PRIMARY]  61.59,-43.43 0 bottom  (outside the outline)
FB8  0.1_Ohm,_0805  [SM-7351-IND-0805_1PRIMARY]  57.66,-43.43 0 bottom  (outside the outline)
J1  HEADER_6  [SIP6_1PRIMARY]  42.55,-46.99 90 top  (outside the outline)
L1  2.2uH,_2.6A  [2520_1PRIMARY]  15.16,-46.02 180 bottom  (outside the outline)
L2  2.2uH,_2.6A  [2520_1PRIMARY]  19.3,-46.02 0 bottom  (outside the outline)
L3  2.2uH,_2.6A  [2520_1PRIMARY]  22.53,-39.37 90 bottom  (outside the outline)
MTG1  MHOLE  [MTGH200C125D_PL_1PRIMARY]  8.26,-51.03 90 top  (outside the outline)
MTG2  MHOLE  [MTGH200C125D_PL_1PRIMARY]  74.3,-47.85 90 top  (outside the outline)
MTG3  MHOLE  [MTGH200C125D_PL_1PRIMARY]  8.26,-2.77 90 top  (outside the outline)
MTG4  MHOLE  [MTGH200C125D_PL_1PRIMARY]  74.3,-5.94 90 top  (outside the outline)
P2  CTI_JTAG,DNI  [HEADER10X2_SMD_1PRIMARY]  28.88,-41.58 270 bottom  (outside the outline)
P3  USB-A_Conn._-_87520-xx1xx  [USB_A_SH_1PRIMARY]  72.97,-37.8 90 top  (outside the outline)
P4  mini_USB-B  [USB5MINI_4SHIELDED_SMD-5_1PRIMARY]  -3.25,-10.46 0 bottom  (outside the outline)
R1  100K,_1%  [402_2PRIMARY]  16.81,-32.69 270 bottom  (outside the outline)
R3  1.5K,_1%  [402_2PRIMARY]  19.68,-32.69 270 top  (outside the outline)
R4  1.5K,_1%  [402_2PRIMARY]  20.62,-32.69 270 top  (outside the outline)
R5  0R,_1%  [402_2PRIMARY]  9.83,-38.73 180 top  (outside the outline)
R6  0R,_1%  [402_2PRIMARY]  12.45,-45.97 270 bottom  (outside the outline)
R7  0R,_1%  [402_2PRIMARY]  5.08,-38.73 180 top  (outside the outline)
R8  0R,_1%  [402_2PRIMARY]  5.08,-37.47 180 top  (outside the outline)
R9  0R,_1%,_DNI  [402_2PRIMARY]  5.08,-36.2 0 top  (outside the outline)
R10  470K,_5%  [402_2PRIMARY]  1.9,-37.47 180 top  (outside the outline)
R11  280K,_1%  [402_1PRIMARY]  1.9,-36.2 180 bottom  (outside the outline)
R12  820,_5%  [402_1PRIMARY]  -2.54,-38.1 0 bottom  (outside the outline)
R14  10K,_1%  [402_1PRIMARY]  22.53,-42.55 0 bottom  (outside the outline)
R17  1M,_1%  [402_1PRIMARY]  38.86,-15.62 0 bottom  (outside the outline)
R18  33,_0402  [402_2PRIMARY]  35.56,-43.18 270 bottom  (outside the outline)
R19  0R,_1%  [402_2PRIMARY]  35.23,-34.92 270 bottom  (outside the outline)
R20  0R,_1%  [402_1PRIMARY]  36.2,-34.92 90 bottom  (outside the outline)
R21  33,_0402  [402_2PRIMARY]  41.91,-43.18 270 bottom  (outside the outline)
R22  49.9,_1%  [402_1PRIMARY]  49.53,-26.19 0 bottom  (outside the outline)
R23  4.75K,_1%  [402_2PRIMARY]  30.48,-42.21 270 top  (outside the outline)
R24  4.75K,_1%  [402_2PRIMARY]  30.48,-40.01 90 top  (outside the outline)
R25  4.75K,_1%  [402_2PRIMARY]  30.48,-46.02 90 top  (outside the outline)
R26  4.75K,_1%  [402_1PRIMARY]  43.81,-34.92 90 bottom  (outside the outline)
R27  0R,_1%  [402_2PRIMARY]  38.25,-35.23 180 top  (outside the outline)
R28  33,_0402  [402_2PRIMARY]  27.94,-26.8 180 top  (outside the outline)
R45  33,_0402  [402_2PRIMARY]  43.81,-10.67 90 top  (outside the outline)
R46  33,_0402  [402_2PRIMARY]  45.09,-10.67 90 top  (outside the outline)
R47  33,_0402  [402_2PRIMARY]  45.09,-14.22 90 top  (outside the outline)
R48  33,_0402  [402_2PRIMARY]  43.81,-14.22 90 top  (outside the outline)
R49  0R,_1%  [402_1PRIMARY]  31.75,-20.62 180 bottom  (outside the outline)
R50  0R,_1%  [402_2PRIMARY]  30.48,-36.83 270 top  (outside the outline)
R51  0R,_1%  [402_1PRIMARY]  34.29,-34.92 90 bottom  (outside the outline)
R52  10k,_1%  [402_2PRIMARY]  76.81,-36.2 270 bottom  (outside the outline)
R53  10k,_1%  [402_1PRIMARY]  70.46,-36.2 90 bottom  (outside the outline)
R54  10k,_1%  [402_1PRIMARY]  44.75,-34.92 90 bottom  (outside the outline)
R55  100K,_1%,_DNI  [402_1PRIMARY]  52.07,-7.62 90 bottom  (outside the outline)
R56  100K,_1%  [402_1PRIMARY]  51.1,-7.62 90 bottom  (outside the outline)
R57  100K,_1%,_DNI  [402_1PRIMARY]  53.98,-7.62 90 bottom  (outside the outline)
R58  100K,_1%,DNI  [402_1PRIMARY]  54.91,-7.62 90 bottom  (outside the outline)
R59  100K,_1%,_DNI  [402_1PRIMARY]  53.01,-7.62 90 bottom  (outside the outline)
R60  100K,_1%,DNI  [402_1PRIMARY]  55.88,-7.62 90 bottom  (outside the outline)
R61  100K,_1%,DNI  [402_1PRIMARY]  56.82,-7.62 90 bottom  (outside the outline)
R62  100K,_1%,DNI  [402_1PRIMARY]  57.79,-7.62 90 bottom  (outside the outline)
R63  100K,_1%,DNI  [402_1PRIMARY]  58.72,-7.62 90 bottom  (outside the outline)
R64  100K,_1%,DNI  [402_1PRIMARY]  59.69,-7.62 90 bottom  (outside the outline)
R65  100K,_1%  [402_1PRIMARY]  60.63,-7.62 90 bottom  (outside the outline)
R66  100K,_1%  [402_1PRIMARY]  61.59,-7.62 90 bottom  (outside the outline)
R67  100K,_1%  [402_1PRIMARY]  62.53,-7.62 90 bottom  (outside the outline)
R68  100K,_1%  [402_1PRIMARY]  63.5,-7.62 90 bottom  (outside the outline)
R69  100K,_1%,_DNI  [402_1PRIMARY]  64.44,-7.62 90 bottom  (outside the outline)
R70  100K,_1%,DNI  [402_1PRIMARY]  65.41,-7.62 90 bottom  (outside the outline)
R71  820,_5%  [402_2PRIMARY]  0,-10.16 180 top  (outside the outline)
R72  820,_5%  [402_2PRIMARY]  0,-7.29 180 top  (outside the outline)
R73  820,_5%  [402_2PRIMARY]  0,-8.26 180 top  (outside the outline)
R74  820,_5%  [402_2PRIMARY]  0,-9.19 180 top  (outside the outline)
R75  100  [402_2PRIMARY]  67.31,-7.62 270 top  (outside the outline)
R76  100K,_1%  [402_1PRIMARY]  6.65,-8.56 90 bottom  (outside the outline)
R77  100K,_1%  [402_2PRIMARY]  7.92,-8.56 270 bottom  (outside the outline)
R78  100K,_1%  [402_1PRIMARY]  3.17,-8.56 90 bottom  (outside the outline)
R79  100K,_1%  [402_2PRIMARY]  4.44,-8.56 270 bottom  (outside the outline)
R80  100K,_1%  [402_2PRIMARY]  52.07,-7.62 270 top  (outside the outline)
R81  100K,_1%,_DNI  [402_2PRIMARY]  51.1,-7.62 270 top  (outside the outline)
R82  100K,_1%  [402_2PRIMARY]  53.98,-7.62 270 top  (outside the outline)
R83  100K,_1%  [402_2PRIMARY]  54.91,-7.62 270 top  (outside the outline)
R84  100K,_1%  [402_2PRIMARY]  53.01,-7.62 270 top  (outside the outline)
R85  100K,_1%  [402_2PRIMARY]  55.88,-7.62 270 top  (outside the outline)
R86  100K,_1%  [402_2PRIMARY]  56.82,-7.62 270 top  (outside the outline)
R87  100K,_1%  [402_2PRIMARY]  57.79,-7.62 270 top  (outside the outline)
R88  100K,_1%  [402_2PRIMARY]  58.72,-7.62 270 top  (outside the outline)
R89  100K,_1%  [402_2PRIMARY]  59.69,-7.62 270 top  (outside the outline)
R90  100K,_1%,_DNI  [402_2PRIMARY]  60.63,-7.62 270 top  (outside the outline)
R91  100K,_1%,_DNI  [402_2PRIMARY]  61.59,-7.62 270 top  (outside the outline)
R92  100K,_1%,_DNI  [402_2PRIMARY]  62.53,-7.62 270 top  (outside the outline)
R93  100K,_1%,_DNI  [402_2PRIMARY]  63.5,-7.62 270 top  (outside the outline)
R94  100K,_1%  [402_2PRIMARY]  64.44,-7.62 270 top  (outside the outline)
R95  100K,_1%  [402_2PRIMARY]  65.41,-7.62 270 top  (outside the outline)
R96  10k,_1%  [402_1PRIMARY]  62.23,-31.45 0 bottom  (outside the outline)
R97  1.5K,_1%  [402_1PRIMARY]  57.15,-35.43 0 bottom  (outside the outline)
R98  10k,_1%  [402_1PRIMARY]  57.15,-29.03 0 bottom  (outside the outline)
R99  240,_1%  [402_2PRIMARY]  62.23,-32.64 0 bottom  (outside the outline)
R100  10k,_1%  [402_1PRIMARY]  57.15,-31.45 0 bottom  (outside the outline)
R101  10k,_1%  [402_1PRIMARY]  42.55,-7.62 90 bottom  (outside the outline)
R102  10k,_1%  [402_1PRIMARY]  40,-7.62 90 bottom  (outside the outline)
R103  10k,_1%  [402_1PRIMARY]  19.68,-7.62 90 bottom  (outside the outline)
R104  10k,_1%  [402_1PRIMARY]  20.95,-7.62 90 bottom  (outside the outline)
R105  10k,_1%  [402_1PRIMARY]  41.27,-7.62 90 bottom  (outside the outline)
R106  10k,_1%  [402_1PRIMARY]  37.46,-7.62 90 bottom  (outside the outline)
R107  10k,_1%  [402_1PRIMARY]  17.15,-7.62 90 bottom  (outside the outline)
R108  10k,_1%  [402_1PRIMARY]  18.41,-7.62 90 bottom  (outside the outline)
R109  10k,_1%  [402_1PRIMARY]  36.2,-7.62 90 bottom  (outside the outline)
R110  10k,_1%  [402_1PRIMARY]  38.73,-7.62 90 bottom  (outside the outline)
R111  10k,_1%  [402_2PRIMARY]  22.86,-7.62 270 bottom  (outside the outline)
R112  1.5K,_1%  [402_1PRIMARY]  24.13,-23.8 180 bottom  (outside the outline)
R150  10k,_1%  [402_2PRIMARY]  74.93,-12.45 90 top  (outside the outline)
R151  10k,_1%  [402_2PRIMARY]  76.84,-12.45 90 top  (outside the outline)
R152  10k,_1%  [402_2PRIMARY]  76.84,-21.34 270 top  (outside the outline)
R153  10k,_1%  [402_2PRIMARY]  75.87,-21.34 270 top  (outside the outline)
R154  10k,_1%  [402_2PRIMARY]  74.93,-21.34 270 top  (outside the outline)
R155  10k,_1%  [402_2PRIMARY]  75.87,-12.45 90 top  (outside the outline)
R156  10k,_1%  [402_1PRIMARY]  18.72,-32.69 90 bottom  (outside the outline)
R157  10k,_1%  [402_2PRIMARY]  65.41,-11.43 270 top  (outside the outline)
R159  0R,_1%  [402_1PRIMARY]  17.15,-16.18 180 bottom  (outside the outline)
R160  0R,_1%  [402_1PRIMARY]  32.05,-12.7 90 bottom  (outside the outline)
R161  0R,_1%  [402_1PRIMARY]  30.78,-12.7 90 bottom  (outside the outline)
R162  0R,_1%  [402_2PRIMARY]  24.13,-7.62 270 bottom  (outside the outline)
R163  4.75K,_1%  [402_1PRIMARY]  41.58,-38.4 90 bottom  (outside the outline)
R164  4.75K,_1%  [402_1PRIMARY]  42.85,-38.4 90 bottom  (outside the outline)
R165  100K,_1%  [402_2PRIMARY]  40,-43.18 90 top  (outside the outline)
R167  33,_0402  [402_2PRIMARY]  34.59,-12.7 270 bottom  (outside the outline)
S1  KMR231GLFS  [SW4SMD_63X161LS_1PRIMARY]  1.57,-3.18 180 top
S2  KMR231GLFS  [SW4SMD_63X161LS_1PRIMARY]  69.22,-11.43 180 top  (outside the outline)
S3  KMR231GLFS  [SW4SMD_63X161LS_1PRIMARY]  1.57,-12.7 180 top  (outside the outline)
TP1  TESTPT1  [TP1-8040_1PRIMARY]  52.71,-43.81 0 top  (outside the outline)
TP2  TESTPT1  [TP60C_SMD_1PRIMARY]  51.1,-39.04 0 top  (outside the outline)
TP3  TESTPT1  [TP60C_SMD_1PRIMARY]  45.09,-34.92 0 top  (outside the outline)
TP4  TESTPT1  [TP1-8040_1PRIMARY]  -2.54,-35.56 0 top  (outside the outline)
U3  SN74LVC1G06DCK  [DCK5_2P15X1P4_1PRIMARY]  33.96,-8.89 0 top  (outside the outline)
U4  TL5209  [SO8-25X75_1PRIMARY]  7.29,-38.1 270 bottom  (outside the outline)
U5  IC_AM335X_ZCE_1  [AM33XX_15X15_1PRIMARY]  39.37,-25.4 180 top  (outside the outline)
U6  SN74LVC1G74DCTR  [SOP8_DCT_1PRIMARY]  38.73,-43.18 270 bottom  (outside the outline)
U7  24LC32A  [SOT23-5_1PRIMARY]  23.16,-32.69 90 bottom  (outside the outline)
U8  TPS2051__DGN_  [DGN-16X60_1PRIMARY]  73,-40.01 270 bottom  (outside the outline)
U9  TPD4S012  [U_6_DRY_1PRIMARY]  73,-36.2 90 bottom  (outside the outline)
U10  TPD4S012  [U_6_DRY_1PRIMARY]  6.65,-12.7 270 top  (outside the outline)
U12  MT41K256M16HA_-125:E  [BGA96_T9_P8_9X14_1PRIMARY]  57.15,-29.85 0 top  (outside the outline)
U13  eMMC,_2GB  [BGA153_P14_P5_11P5X13_1PRIMARY]  23.49,-12.7 270 top  (outside the outline)
U15  SN74LVC2G241  [U_8_DCU_1PRIMARY]  46.23,-43.18 270 bottom  (outside the outline)
Y1  32.768kHz  [XTAL4_126-216SMD_1PRIMARY]  44.75,-40.64 270 top  (outside the outline)
Y2  24MHz  [XTAL150SMD_125X196_1PRIMARY]  38.86,-13.21 180 bottom  (outside the outline)
Y4  24.576MHz  [OSC4_61X65LS_79X98SMD_1PRIMARY]  33.96,-13 0 top  (outside the outline)

## Library data of the parts
C1-C4 C7-C22 C24-C130 C152-C155 C158 C159 D1-D5 DUMMY1-DUMMY3 FB1-FB5 FB7 FB8 J1 L1-L3 MTG1-MTG4 P2-P4 R1 R3-R12 R14 R17-R28 R45-R112 R150-R157 R159-R165 R167 S1-S3 TP1-TP4 U3-U10 U12 U13 U15 Y1 Y2 Y4 = BeagleBone_Black_RevB4

## Nets
12M_LOOP: U6.2 U6.3
12MHZ: R21.2
AIN0: U5.24
AIN1: U5.43
AIN2: U5.25
AIN3: U5.7
AIN4: U5.44
AIN5: U5.26
AIN6: U5.8
AIN7: R163.2 R164.1 U5.45
B_UART0_RX: J1.4 R165.1 U15.2
B_UART0_TX: J1.5 U15.3
CAP_VBB_MPU: C91.1 U5.46
CAP_VDD_SRAM_CORE: C89.1 U5.63
CAP_VDD_SRAM_MPU: C90.1 U5.65
CLKOUT2: P2.18 R19.2 R20.1
CLKOUT_SRC: R19.1 U5.68
DDR_A0: U5.93 U12.75
DDR_A1: U5.127 U12.82
DDR_A2: U5.76 U12.81
DDR_A3: U5.39 U12.74
DDR_A4: U5.38 U12.83
DDR_A5: U5.19 U12.80
DDR_A6: U5.59 U12.89
DDR_A7: U5.74 U12.86
DDR_A8: U5.58 U12.95
DDR_A9: U5.37 U12.87
DDR_A10: U5.94 U12.64
DDR_A11: U5.92 U12.88
DDR_A12: U5.75 U12.76
DDR_A13: U5.129 U12.93
DDR_A14: U5.130 U12.94
DDR_A15: U5.57 U12.70
DDR_BA0: U5.40 U12.68
DDR_BA1: U5.73 U12.77
DDR_BA2: U5.21 U12.69
DDR_CASN: U5.91 U12.57
DDR_CKE: R96.2 U5.111 U12.60
DDR_CLK: U5.56 U12.52
DDR_CLKN: U5.55 U12.58
DDR_CSN: U5.128 U12.62
DDR_D0: U5.201 U12.27
DDR_D1: U5.202 U12.34
DDR_D2: U5.217 U12.32
DDR_D3: U5.218 U12.35
DDR_D4: U5.219 U12.45
DDR_D5: U5.220 U12.47
DDR_D6: U5.237 U12.38
DDR_D7: U5.238 U12.46
DDR_D8: U5.145 U12.22
DDR_D9: U5.163 U12.15
DDR_D10: U5.164 U12.17
DDR_D11: U5.165 U12.14
DDR_D12: U5.166 U12.4
DDR_D13: U5.183 U12.2
DDR_D14: U5.184 U12.11
DDR_D15: U5.199 U12.3
DDR_DQM0: U5.200 U12.28
DDR_DQM1: U5.146 U12.21
DDR_DQS0: U5.235 U12.33
DDR_DQS1: U5.181 U12.16
DDR_DQSN0: U5.236 U12.39
DDR_DQSN1: U5.182 U12.10
DDR_ODT: U5.109 U12.55
DDR_RASN: U5.112 U12.51
DDR_RESETN: R97.2 U5.110 U12.92
DDR_VREF: C28.1 C123.1 C124.1 R98.2 R100.1 U5.148 U12.43 U12.71
DDR_VTP: R22.2 U5.147
DDR_WEN: U5.20 U12.63
DGND: C1.1 C2.1 C3.1 C4.1 C7.1 C8.1 C9.1 C10.1 C11.1 C12.1 C13.1 C14.1 C15.1 C16.2 C17.2 C18.2 C19.2 C20.2 C24.2 C27.2 C28.2 C29.2 C30.2 C34.2 C35.2 C37.2 C38.2 C39.1 C40.1 C41.2 C42.2 C43.2 C44.2 C45.2 C46.2 C47.2 C48.2 C49.2 C50.2 C51.2 C52.2 C53.2 C54.2 C55.1 C56.1 C57.1 C58.2 C59.2 C60.1 C61.1 C62.1 C63.2 C64.2 C65.2 C66.2 C67.2 C68.1 C69.1 C70.1 C71.1 C72.1 C73.1 C74.1 C75.1 C76.1 C77.2 C78.2 C79.2 C80.2 C81.2 C82.2 C83.2 C84.2 C85.2 C86.2 C87.2 C88.2 C89.2 C90.2 C91.2 C92.2 C94.2 C95.1 C96.1 C97.2 C98.2 C99.2 C100.2 C101.2 C102.2 C103.2 C104.2 C105.2 C106.2 C107.2 C108.2 C109.2 C110.2 C111.2 C112.2 C113.2 C114.2 C115.2 C116.2 C117.2 C118.1 C119.2 C120.2 C121.2 C122.1 C123.2 C124.2 C125.2 C126.1 C127.2 C128.2 C129.2 C130.2 C152.2 C153.2 C154.2 C155.1 C158.2 C159.2 FB3.2 J1.1 P2.4 P2.8 P2.10 P2.12 P2.16 P2.20 P3.4 R10.2 R12.1 R22.1 R25.2 R49.1 R53.2 R54.1 R80.2 R81.2 R82.2 R83.2 R84.2 R85.2 R86.2 R87.2 R88.2 R89.2 R90.2 R91.2 R92.2 R93.2 R94.2 R95.2 R96.1 R99.1 R100.2 R164.2 R165.2 S2.2 S2.4 TP1.1 U3.3 U4.5 U4.6 U4.7 U4.8 U5.1 U5.18 U5.98 U5.116 U5.117 U5.119 U5.120 U5.132 U5.133 U5.134 U5.135 U5.136 U5.138 U5.150 U5.151 U5.152 U5.153 U5.154 U5.155 U5.169 U5.171 U5.172 U5.173 U5.190 U5.191 U5.192 U5.193 U5.204 U5.205 U5.206 U5.207 U5.208 U5.210 U5.212 U5.223 U5.226 U5.227 U5.230 U5.307 U5.324 U6.4 U7.2 U8.1 U8.9 U9.4 U12.6 U12.7 U12.9 U12.12 U12.19 U12.23 U12.25 U12.26 U12.29 U12.36 U12.37 U12.41 U12.42 U12.50 U12.53 U12.67 U12.72 U12.79 U12.84 U12.91 U12.96 U13.32 U13.55 U13.73 U13.82 U13.100 U13.127 U13.130 U13.143 U13.145 U15.1 U15.4 Y4.2
EHRPWM1A: U5.302
EHRPWM1B: U5.284
EHRPWM2A: U5.298
EHRPWM2B: U5.280
EMMC_RSTN: R111.2 R162.2 U13.97
EMMC_VCCI: C125.1 U13.30
ENZ_KALDO_1P8V: R54.2 U5.22
GND_EARTH: MTG2.1 MTG3.1 MTG4.1 P3.5 P3.6 P4.6 P4.7 P4.8 P4.9
GND_OSC0: C25.2 C26.2 U5.317
GND_OSC1: C21.1 C22.1 U5.5
GNDA_ADC: C31.2 C32.2 C33.2 C93.2 FB3.1 U5.9 U5.80
GPIO0_7: R50.1 R51.1
GPIO0_7SRC: R50.2 U5.54
GPIO0_26: U5.281
GPIO0_27: U5.300
GPIO1_12: U5.282
GPIO1_13: U5.264
GPIO1_14: U5.319
GPIO1_15: U5.301
GPIO1_16: R160.2 R161.2
GPIO1_17: U5.320
GPIO1_28: U5.306
GPIO1_29: U5.312
GPIO2_1: U5.318
GPIO3_18: R51.2 U5.30
GPIO3_19: U5.49
GPIO3_20: R20.2 U5.67
GPIO3_21: R167.2 U5.14
HDMI_1V8: FB5.1
HDMI_INT: U5.304
HDMICLK_DISN: U5.323 Y4.1
I2C0_SCL: R3.2 U5.52 U7.1
I2C0_SDA: R4.2 U5.53 U7.3
I2C1_SCL: U5.16
I2C1_SDA: U5.34
I2C2_SCL: U5.71
I2C2_SDA: U5.72
JTAG_EMU0: P2.13 R23.2 U5.50
JTAG_EMU1: P2.14 R24.2 U5.32
JTAG_TCK: P2.9 P2.11 U5.12
JTAG_TDI: P2.3 U5.29
JTAG_TDO: P2.7 U5.11
JTAG_TMS: P2.1 U5.47
JTAG_TRSTN: P2.2 R25.1 U5.28
LCD_DATA0: R70.2 R95.1 U5.253
LCD_DATA1: R69.2 R94.1 U5.254
LCD_DATA2: R68.2 R75.1 R93.1 U5.255
LCD_DATA3: R67.2 R92.1 U5.256
LCD_DATA4: R66.2 R91.1 U5.271
LCD_DATA5: R65.2 R90.1 U5.272
LCD_DATA6: R64.2 R89.1 U5.273
LCD_DATA7: R63.2 R88.1 U5.274
LCD_DATA8: R62.2 R87.1 U5.289
LCD_DATA9: R61.2 R86.1 U5.290
LCD_DATA10: R60.2 R85.1 U5.291
LCD_DATA11: R59.2 R84.1 U5.292
LCD_DATA12: R58.2 R83.1 U5.308
LCD_DATA13: R57.2 R82.1 U5.309
LCD_DATA14: R56.2 R81.1 U5.310
LCD_DATA15: R55.2 R80.1 U5.275
LCD_DE: R48.2
LCD_HSYNC: R47.2
LCD_PCLK: R45.2
LCD_VSYNC: R46.2
LCDDE: R48.1 U5.258
LCDPCLK: R45.1 U5.311
LCDVHYNC: R47.1 U5.257
LCDVSYNC: R46.1 U5.293
LDO_PGOOD: U5.23
LEDAA: D2.2 R72.2
LEDAC: D2.1
LEDBA: D3.2 R73.2
LEDBC: D3.1
LEDCA: D4.2 R74.2
LEDCC: D4.1
LEDDA: D5.2 R71.2
LEDDC: D5.1
MDIO_CLK: U5.216
MDIO_DATA: U5.215
MII1_COL: U5.142
MII1_CRS_DV: U5.143
MII1_REFCLK: R28.2
MII1_RXCLK: U5.198
MII1_RXD0: U5.214
MII1_RXD1: U5.195
MII1_RXD2: U5.196
MII1_RXD3: U5.197
MII1_RXDV: U5.161
MII1_RXERR: U5.159
MII1_TXCLK: U5.180
MII1_TXD0: U5.179
MII1_TXD1: U5.178
MII1_TXD2: U5.177
MII1_TXD3: U5.162
MII1_TXEN: U5.160
MMC0_CD: P2.19 R157.1 U5.51
MMC0_CLKO: R152.2 U5.125
MMC0_CMD: R151.2 U5.126
MMC0_DAT0: R153.2 U5.124
MMC0_DAT1: R154.2 U5.123
MMC0_DAT2: R150.2 U5.108
MMC0_DAT3: R155.2 U5.107
MMC1_CLK: R110.2 U5.297 U13.117
MMC1_CMD: R109.2 U5.315 U13.116
MMC1_DAT0: R101.2 U5.295 U13.3
MMC1_DAT1: R102.2 U5.313 U13.4
MMC1_DAT2: R103.2 U5.260 U13.5
MMC1_DAT3: R104.2 U5.278 U13.16
MMC1_DAT4: R105.2 U5.296 U13.17
MMC1_DAT5: R106.2 U5.314 U13.18
MMC1_DAT6: R107.2 U5.261 U13.19
MMC1_DAT7: R108.2 U5.279 U13.20
NETC19_1: C19.1 R10.1 R11.2 U4.4
NETR21_1: R21.1 U6.5
NETR75_2: R75.2 S2.1 S2.3
NETR159_2: R159.2 U5.249
NETR162_1: R162.1 U3.4
NETR167_1: R167.1 Y4.3
NETU3_2: U3.2 U5.266
OSC0_IN: C25.1 R17.1 U5.316 Y2.2
OSC0_OUT: C26.1 R17.2 U5.299 Y2.1
OSC1_IN: C21.2 U5.6 Y1.1
OSC1_OUT: C22.2 U5.4 Y1.4
P_BYPASS: C4.2
P_INT_LDO: C3.2
P_L1: L1.1
P_L2: L2.1
P_L3: L3.1
PMIC_INT: R1.2 U5.36
PMIC_PGOOD: U5.33
PMIC_POWR_EN: U5.42
PROC_A15: R18.1 U5.15
PWR_BUT: S3.2 S3.4
PWR_LEDR: D1.1 R12.2
RXD0_MODE0: R112.1
S$41: MTG1.1
S$42: C36.2 P4.5 R76.2 R77.2 R78.2 R79.2 S1.1 S1.3 S3.1 S3.3 U10.4
SPI1_CS0: U5.48
SPI1_D0: U5.31
SPI1_D1: U5.66
SPI1_SCLK: U5.13
SYS_5V: C7.2 C8.2 C10.2 C13.2 C17.1 C34.1 R71.1 R72.1 R73.1 R74.1 U4.2 U8.2 U8.3
SYS_RESETN: C24.1 C30.1 P2.15 R14.2 S1.2 S1.4 U5.10
TESTOUT: TP3.1 U5.3
TIMER4: U5.259
TIMER5: U5.276
TIMER6: U5.294
TIMER7: U5.277
U5_H18: R28.1 U5.144
U5_R13: R160.1 U5.265
U5_T13: R161.1 U5.283
UART0_RX: U5.87 U15.6
UART0_TX: U5.88 U15.5
UART1_RXD: U5.70
UART1_TXD: U5.69
UART2_RXD: U5.17
UART2_TXD: U5.35
UART4_RXD: U5.287
UART4_TXD: U5.305
USB0_DM: P4.2 U5.234 U10.2
USB0_DP: P4.3 U5.233 U10.1
USB0_ID: P4.4 U5.250 U10.3
USB1_DM: P3.2 U5.270 U9.2
USB1_DP: P3.3 U5.269 U9.1
USB1_DRVVBUS: R53.1 U5.105 U8.4
USB1_ID: R49.2 U5.251
USB1_OCN: R52.2 U5.286 U8.5
USB1_PWR: C35.1 FB7.1 FB8.2 U8.6 U8.7 U8.8 U9.6
USB1_VBUS: FB8.1 U5.288
USB_DC: C1.2 C36.1 P4.1 R159.1 U10.6
USR0: R76.1 U5.321
USR1: R77.1 U5.303
USR2: R78.1 U5.285
USR3: R79.1 U5.322
VBUS: FB7.2 P3.1
VDCDC1: L1.2 R6.1
VDD_1V8: C14.2 C78.1 C86.1 C88.1 FB1.1 FB2.2 FB5.2 R9.2 U5.64 U5.81 U5.232 U5.268
VDD_3V3A: C15.2 C27.1 C37.1 C38.1 C56.2 C57.2 C58.1 C59.1 C60.2 C61.2 C66.1 C67.1 C68.2 C69.2 C70.2 C71.2 C72.2 C73.2 C74.2 C75.2 C76.2 C77.1 C87.1 C152.1 C158.1 C159.1 R1.1 R3.1 R4.1 R14.1 R52.1 R55.1 R56.1 R57.1 R58.1 R59.1 R60.1 R61.1 R62.1 R63.1 R64.1 R65.1 R66.1 R67.1 R68.1 R69.1 R70.1 R156.1 U3.5 U5.82 U5.83 U5.84 U5.85 U5.104 U5.122 U5.140 U5.158 U5.176 U5.194 U5.221 U5.231 U5.239 U5.240 U5.241 U5.242 U5.244 U5.245 U5.246 U5.247 U5.267 U6.6 U6.7 U6.8 U7.4 Y4.4
VDD_3V3AUX: C18.1 D1.2 U4.1
VDD_3V3B: C20.1 C29.1 C126.2 C127.1 C128.1 C129.1 C130.1 C153.1 C154.1 C155.2 FB4.1 P2.5 R11.1 R23.1 R24.1 R101.1 R102.1 R103.1 R104.1 R105.1 R106.1 R107.1 R108.1 R109.1 R110.1 R111.1 R112.2 R150.1 R151.1 R152.1 R153.1 R154.1 R155.1 R157.2 R163.1 U4.3 U13.34 U13.54 U13.65 U13.90 U13.101 U13.115 U13.129 U13.142 U13.144 U15.7 U15.8
VDD_5V: C2.2
VDD_ADC: C93.1 FB2.1 R27.1 U5.62
VDD_CORE: C11.2 C39.2 C40.2 C41.1 C42.1 C43.1 C44.1 C45.1 C46.1 C47.1 C48.1 C49.1 C50.1 C51.1 C52.1 C53.1 C54.1 C55.2 L3.2 U5.96 U5.97 U5.114 U5.115 U5.118 U5.137 U5.156 U5.168 U5.170 U5.174 U5.186 U5.187 U5.188 U5.189 U5.209 U5.211 U5.224 U5.225 U5.228 U5.229
VDD_MPU: C12.2 C62.2 C63.1 C64.1 C65.1 L2.2 U5.100 U5.101 U5.102 U5.103 U5.121 U5.139 U5.157
VDD_MPUON: TP2.1 U5.2
VDD_PHYA: FB4.2
VDD_PLL: C79.1 C92.1 C94.1 C106.1 FB1.2 U5.79 U5.141 U5.262 U5.263
VDD_RTC: C104.1 U5.60
VDDS: C80.1 C81.1 C82.1 C83.1 C84.1 C85.1 R8.2 R9.1 U5.78 U5.86 U5.99 U5.175 U5.222 U5.243 U5.248
VDDS_DDR: C9.2 C95.2 C96.2 C97.1 C98.1 C99.1 C100.1 C101.1 C102.1 C103.1 C107.1 C108.1 C109.1 C110.1 C111.1 C112.1 C113.1 C114.1 C115.1 C116.1 C117.1 C118.2 C119.1 C120.1 C121.1 C122.2 R6.2 R97.1 R98.1 U5.77 U5.95 U5.113 U5.131 U5.149 U5.167 U5.185 U12.1 U12.5 U12.8 U12.13 U12.18 U12.20 U12.24 U12.30 U12.31 U12.40 U12.44 U12.48 U12.56 U12.59 U12.73 U12.78 U12.85 U12.90
VIO: R7.2
VLDO1: R5.1 R7.1 R8.1
VREFP_ADC: C31.1 C32.1 C33.1 R27.2 U5.27
VRTC: C16.1 C105.1 R5.2 R26.1 U5.61
WAKEUP: R26.2 U5.41
WP: R156.2 TP4.1 U7.5
XDMA_EVENT_INTR0: P2.17 R18.2 U6.1
ZQ: R99.2 U12.65

## Tracks (layer width: path | path; a pad name or v marks a point on that pad's centre or on a via)
12M_LOOP
  Bottom 0.121: U6.2 38.1,-43.51 38.23,-43.38 38.23,-42.98 38.1,-42.85 U6.3
12MHZ  (via drill 0.2 pad 0.46)
  Top 0.121: 58.4,-18.95 58.4,-19.66 v58.55,-19.81
  Route4 0.133: v58.55,-19.81 59.05,-19.3 62.87,-19.3 65.02,-21.46 65.02,-36.45 64.14,-37.34 63.04,-37.34 59.99,-40.39 55.63,-40.39 v53.85,-42.16
  Bottom 0.121: v53.85,-42.16 53.21,-41.53 43.31,-41.53 42.67,-42.16 42.67,-43.43 42.42,-43.69 R21.2
AIN7  (via drill 0.2 pad 0.46)
  Top 0.121: U5.45 v40.16,-30.99
  Route4 0.133: v41.91,-36.83 41.4,-36.32 41.4,-32.23 v40.16,-30.99
  Bottom 0.121: R164.1 42.42,-38.91 42.21,-38.73 42.21,-38.1 42.04,-37.9 R163.2 41.58,-37.13 v41.91,-36.83
B_UART0_RX
  Top 0.121: J1.4 42.67,-48.13 40.77,-48.13 40,-47.37 R165.1
  Bottom 0.121: J1.4 45.85,-44.96 45.85,-43.69 45.59,-43.43 U15.2
B_UART0_TX
  Bottom 0.121: U15.3 45.59,-42.93 46.1,-43.43 46.1,-45.72 46.35,-45.97 J1.5
CAP_VBB_MPU  (via drill 0.2 pad 0.46)
  Top 0.121: v38.56,-30.99 38.58,-30.99 U5.46
  Bottom 0.121: v38.56,-30.99 38.56,-31.7 39.04,-32.18 C91.1
CAP_VDD_SRAM_CORE  (via drill 0.2 pad 0.46)
  Top 0.121: U5.63 v40.16,-30.2
  Bottom 0.121: v40.16,-30.2 40.56,-30.61 40.56,-31.57 40,-32.13 C89.1
CAP_VDD_SRAM_MPU  (via drill 0.2 pad 0.46)
  Top 0.121: v37.77,-30.2 U5.65
  Bottom 0.121: v37.77,-30.2 38.18,-30.61 38.18,-34.34 C90.1
CLKOUT2
  Bottom 0.121: P2.18 29.64,-37.13 29.31,-36.8 29.31,-34.62 29.92,-34.04 33.53,-34.04 33.78,-33.78 34.54,-33.78 34.72,-33.96 34.72,-34.92 R19.2 R20.1
CLKOUT_SRC  (via drill 0.2 pad 0.46)
  Top 0.121: v35.36,-30.2 U5.68
  Bottom 0.121: v35.36,-30.2 34.98,-30.61 34.98,-31.34 35.23,-31.62 R19.1
CRS  (via drill 0.2 pad 0.46)
  Top 0.121: 23.62,-21.89 23.16,-22.38 22.58,-22.38 v22.1,-22.83 22,-22.73 21.23,-22.73
DDR_A0  (via drill 0.2 pad 0.46)  (1 unrouted)
  Top 0.121: U5.93 v44.96,-28.6
  Route3 0.133: v47.5,-31.5 46.99,-31.5 46.86,-31.62 46.86,-33.4 48.51,-35.05 48.51,-35.31 50.67,-37.46 55.24,-37.46 56.01,-36.7 56.01,-33.91 55.63,-33.53 55.47,-33.53 55.14,-33.83
  Bottom 0.121: v47.5,-31.5 46.23,-30.23 46.23,-28.45 45.97,-28.19 45.36,-28.19 v44.96,-28.6
DDR_A1  (via drill 0.2 pad 0.46)  (1 unrouted)
  Top 0.121: U5.127 48.18,-26.59 50.22,-28.63 51.36,-28.63 52.58,-29.84 v52.58,-30.73
  Route3 0.121: 53.85,-30.73 54.15,-31.04 55.32,-31.04
  Route3 0.133: v52.58,-30.73 53.85,-30.73 | 55.32,-31.04 55.42,-31.04 55.88,-31.5 56.26,-31.5 57.53,-32.77 57.53,-33.78 57.15,-34.16 57.15,-35.71 57.28,-35.84 58.04,-35.84 58.17,-35.71 58.17,-35.56 58.04,-35.43 57.66,-35.43 57.53,-35.31 57.53,-34.42 57.66,-34.29 57.79,-34.29 57.91,-34.42 57.91,-34.92 58.04,-35.05 58.29,-35.05 58.42,-34.92 58.42,-34.42 58.55,-34.29 58.8,-34.29 59.16,-34.65
DDR_A2  (via drill 0.2 pad 0.46)  (1 unrouted)
  Top 0.121: U5.76 v44.17,-29.39
  Route3 0.121: 55.14,-34.65 54.74,-34.24 54.74,-32.51
  Route3 0.133: 54.74,-32.51 54.48,-32.26 53.09,-32.26 52.71,-32.64 50.42,-32.64 50.29,-32.51 50.29,-31.11 50.42,-30.99 51.05,-30.99 51.16,-30.89 51.16,-30.45 51.05,-30.35 50.42,-30.35 50.29,-30.23 50.29,-29.21 48.36,-27.28 48.16,-27.28 47.9,-27.53 47.9,-27.71 48.77,-28.57 48.77,-29.46 48.01,-30.23 44.78,-30.23 44.17,-29.62 v44.17,-29.39
DDR_A3  (via drill 0.2 pad 0.46)  (1 unrouted)
  Top 0.121: U5.39 v44.96,-30.99
  Route3 0.121: 53.26,-33.45 53.95,-33.45 54.36,-33.83